# Altium PCB OpenPack_BATMOD_V1p0.PcbDoc (part 1 of 2)
Units mil, origin at the board's own origin, x right, y up, seen from the top; angles counter-clockwise.
Board outline 5511.81 x 3700.79 mil, 4 copper layers (Top Layer, Mid Layer 1, Mid Layer 2, Bottom Layer), stack 61.811 mil thick; 232 components, 137 nets, 760 pads, 470 vias.
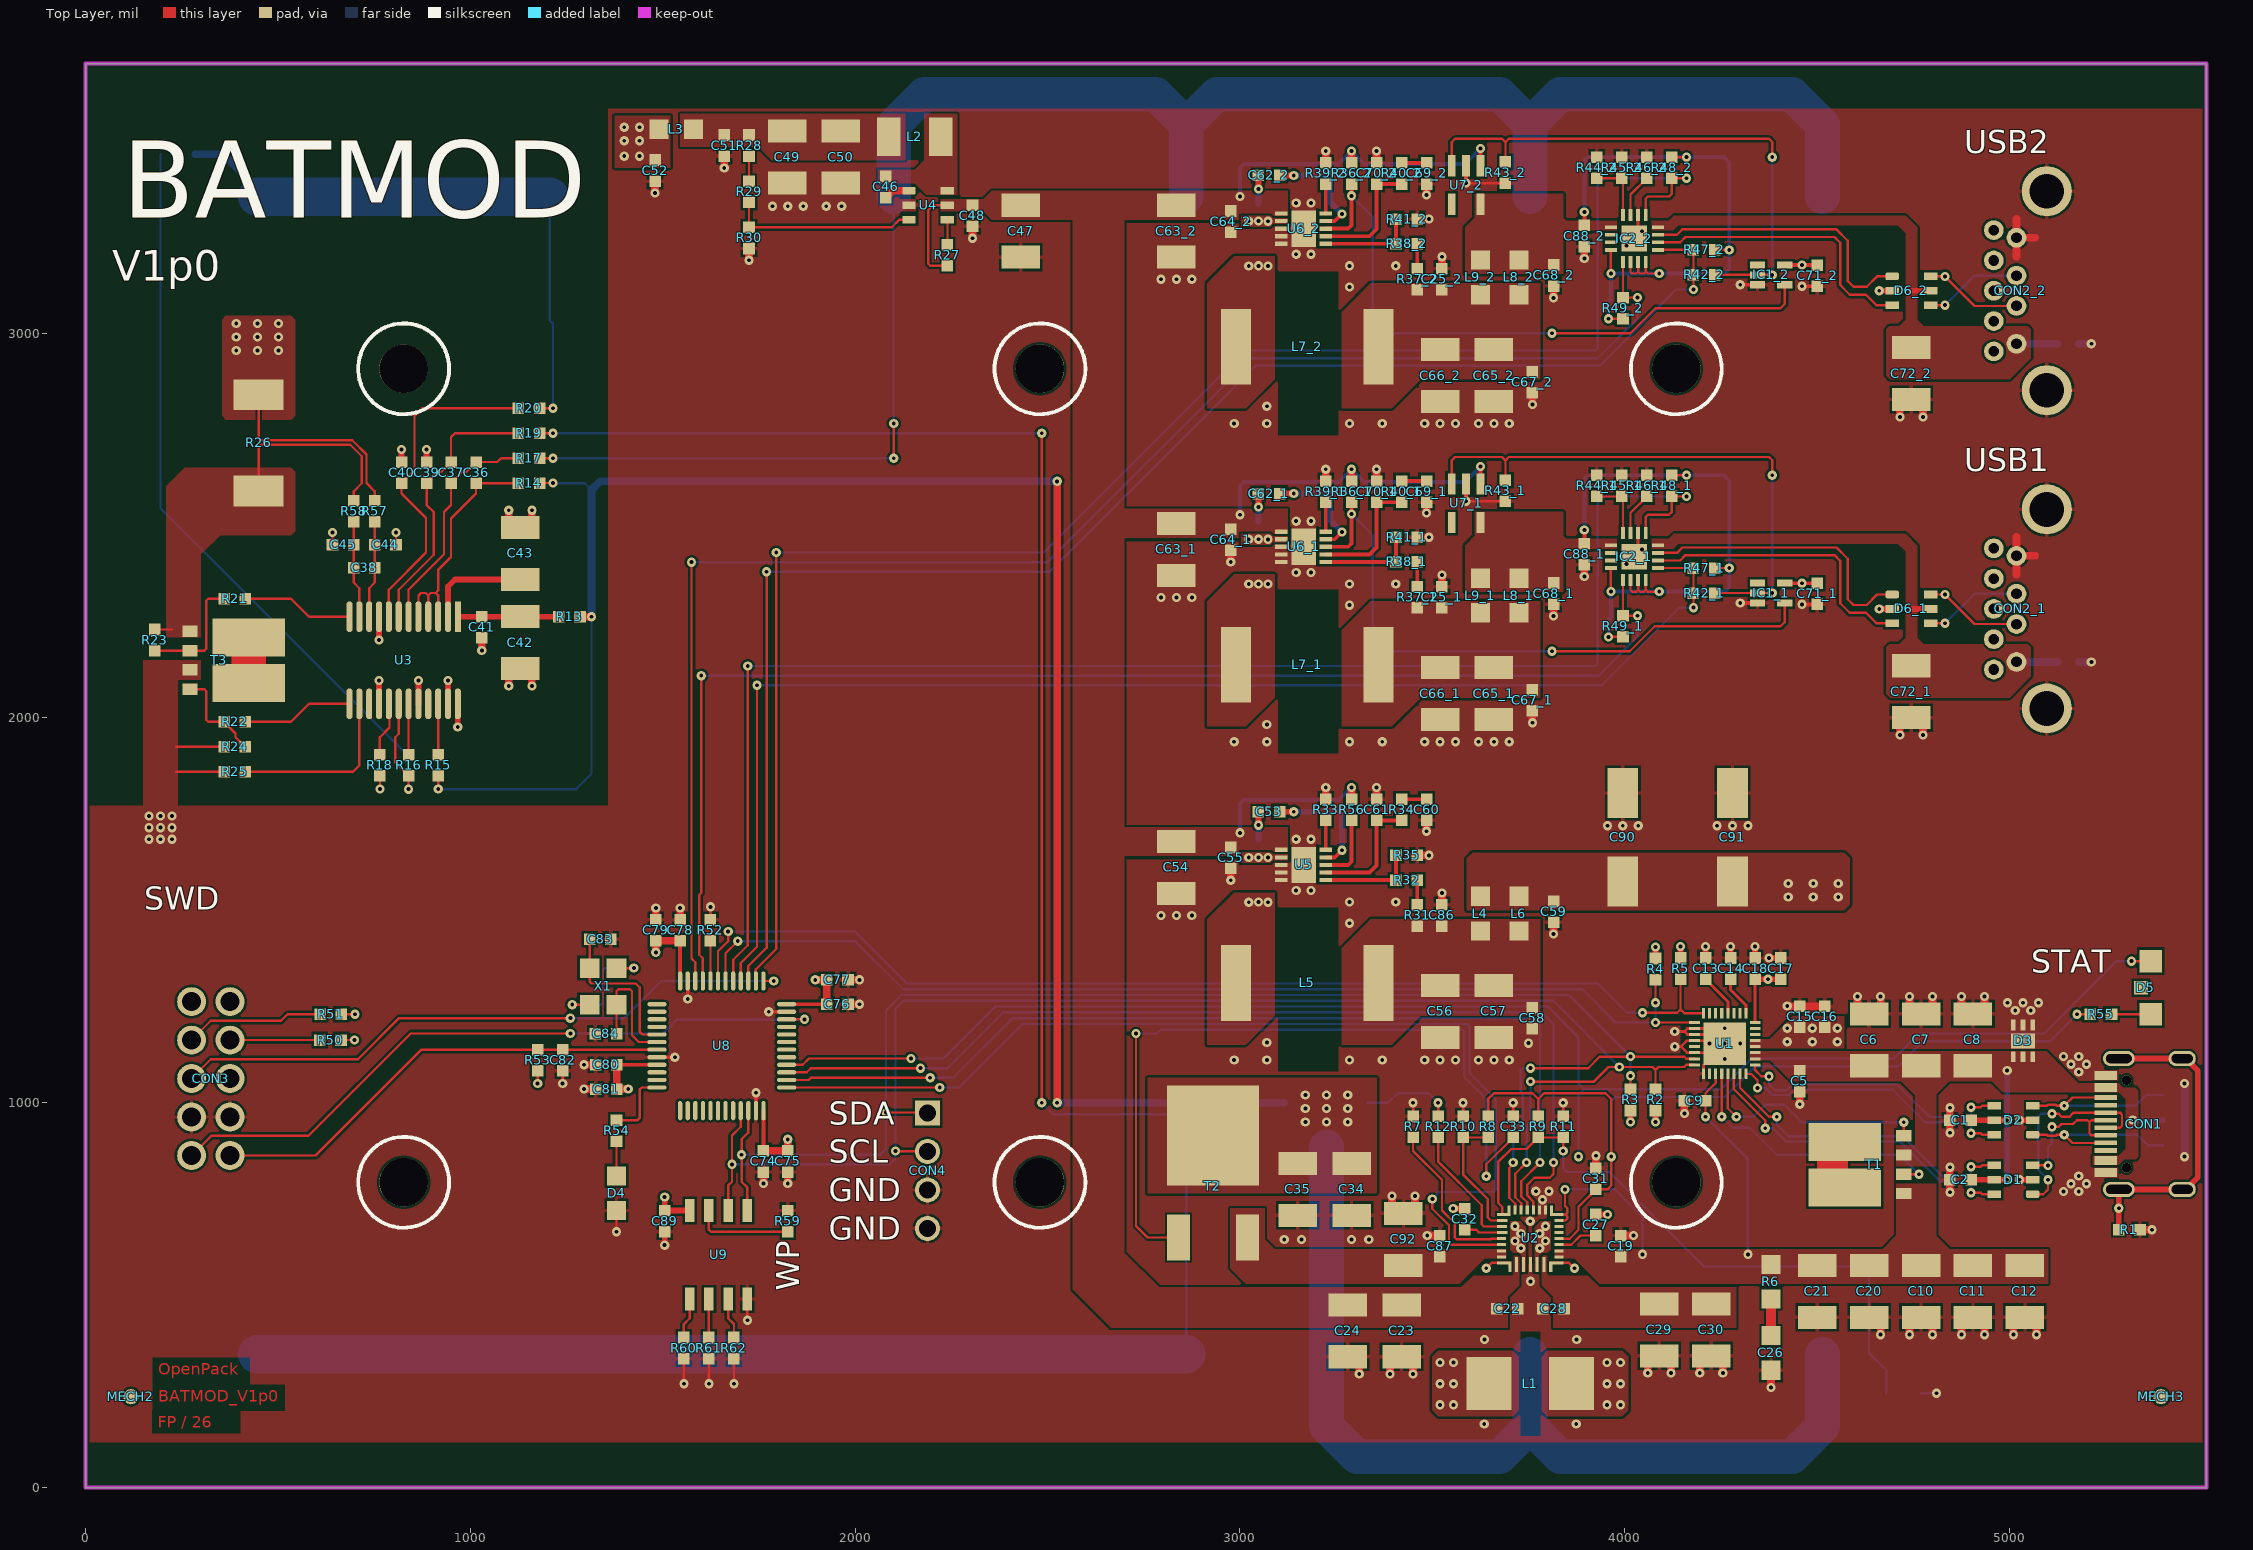
[diagram p0: Top Layer view]
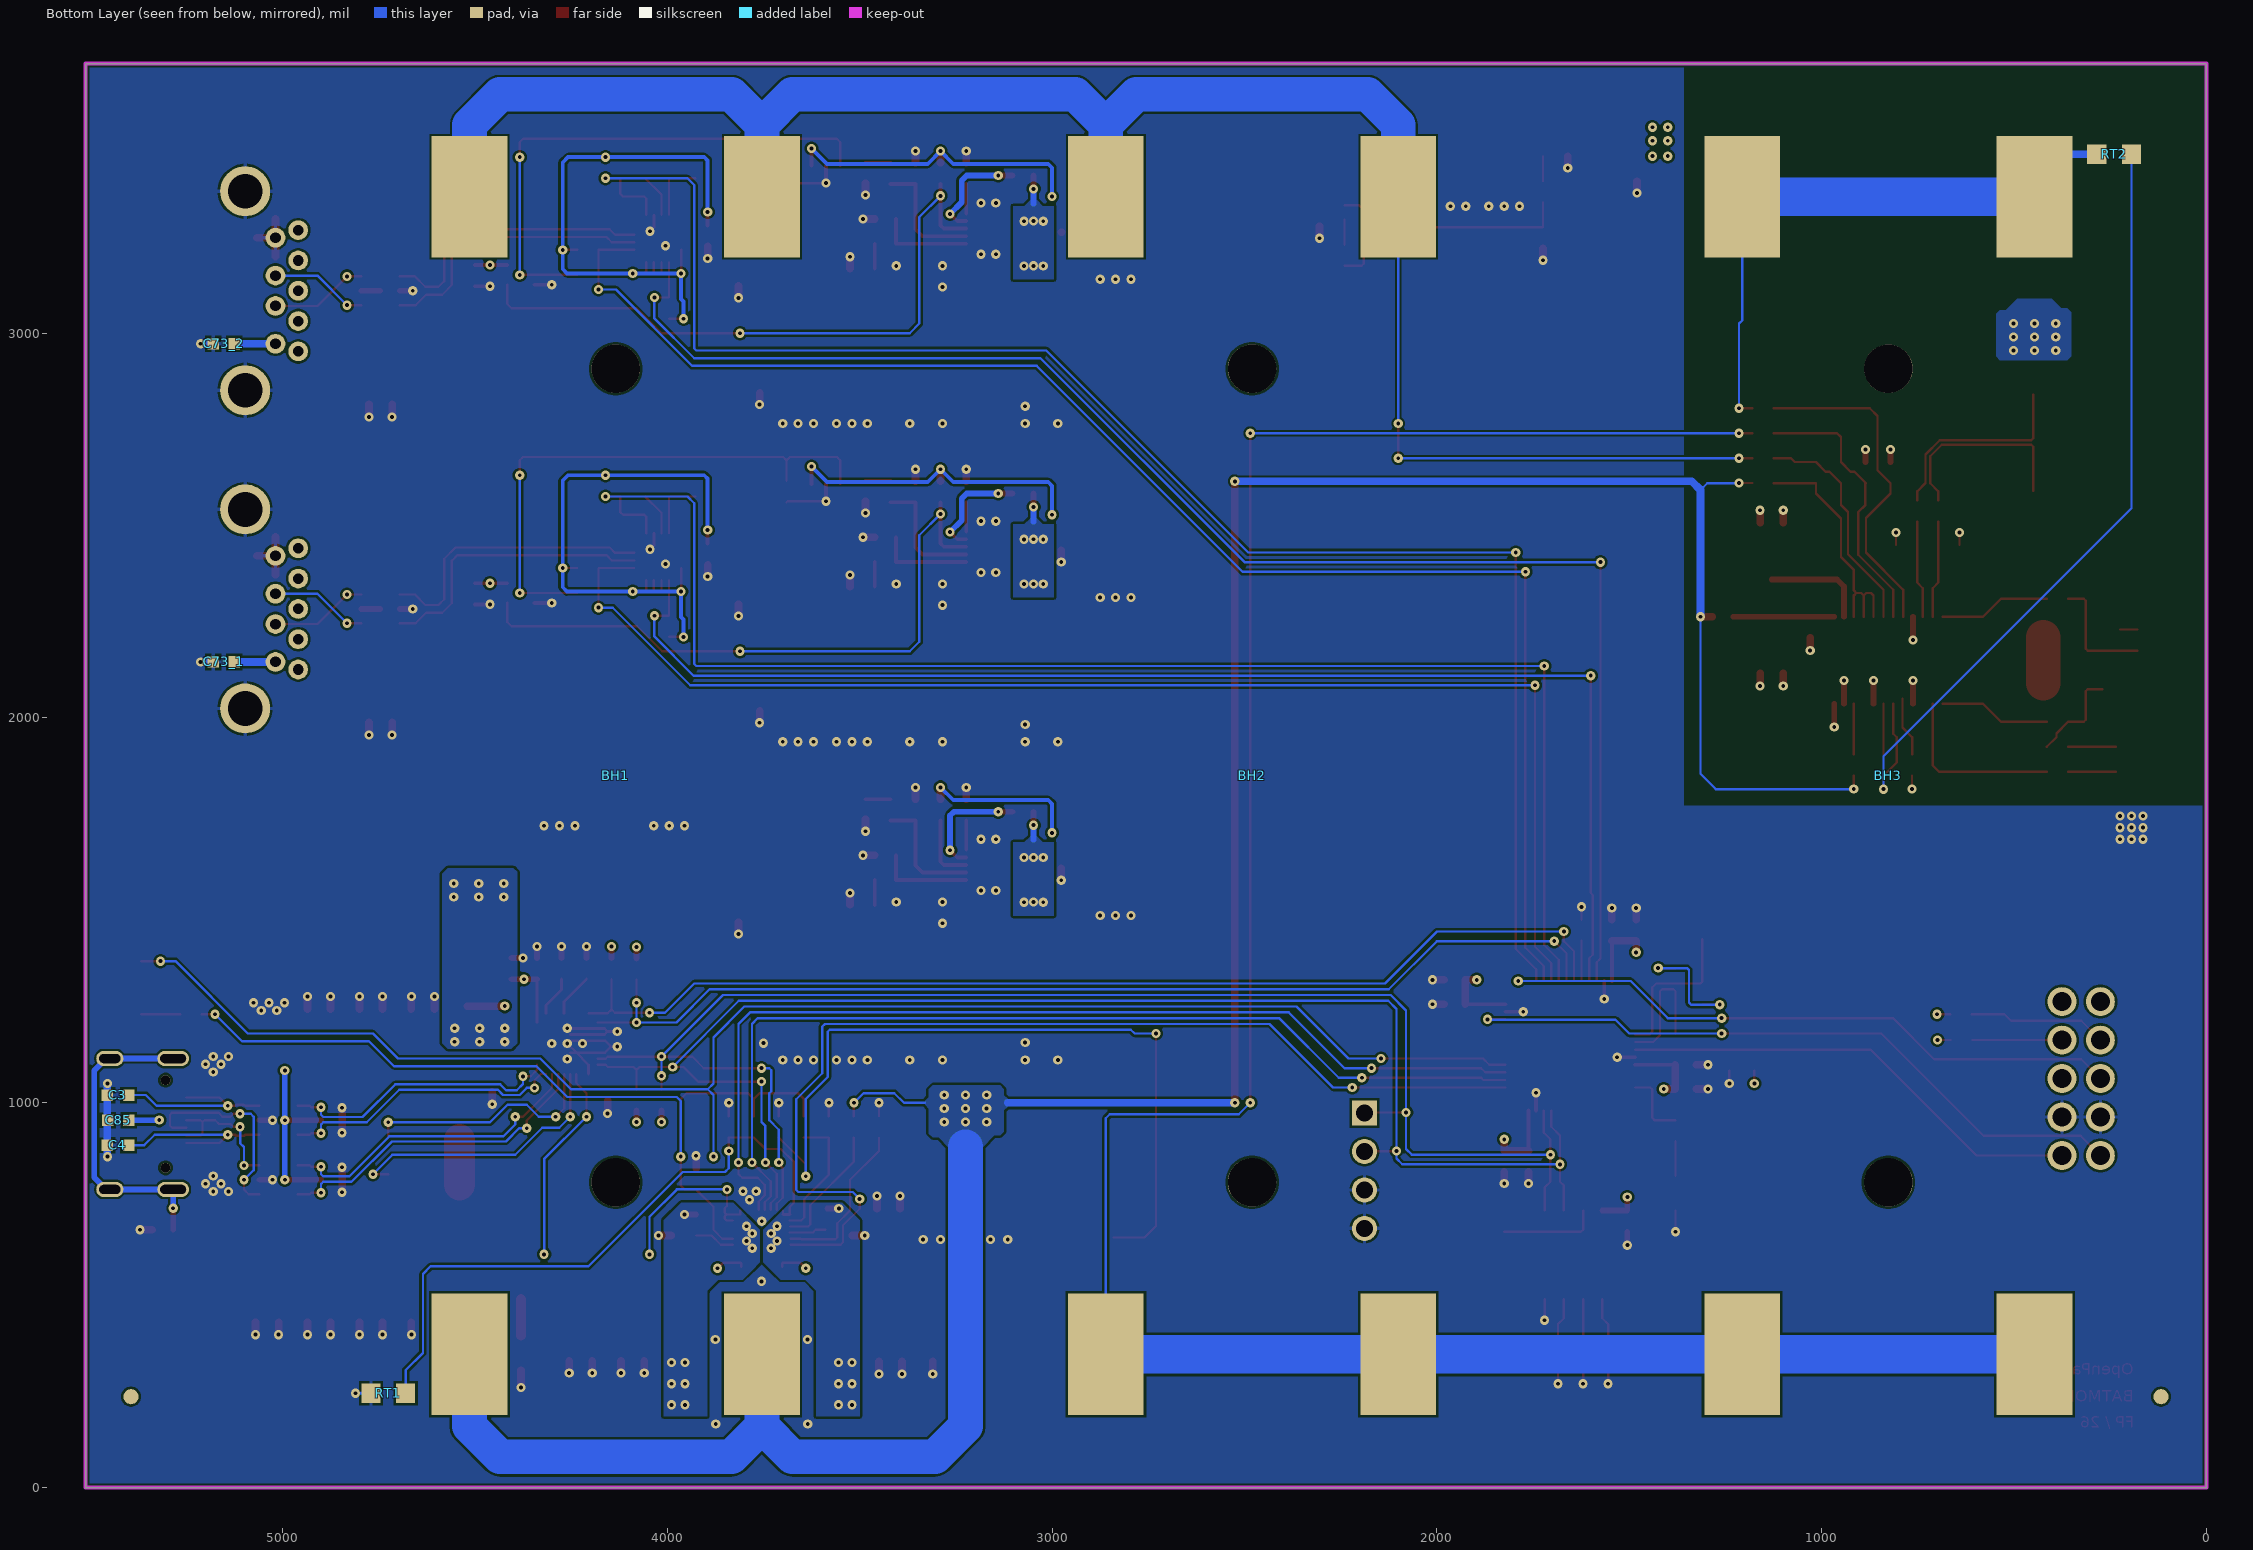
[diagram p1: Bottom Layer view, seen from below]
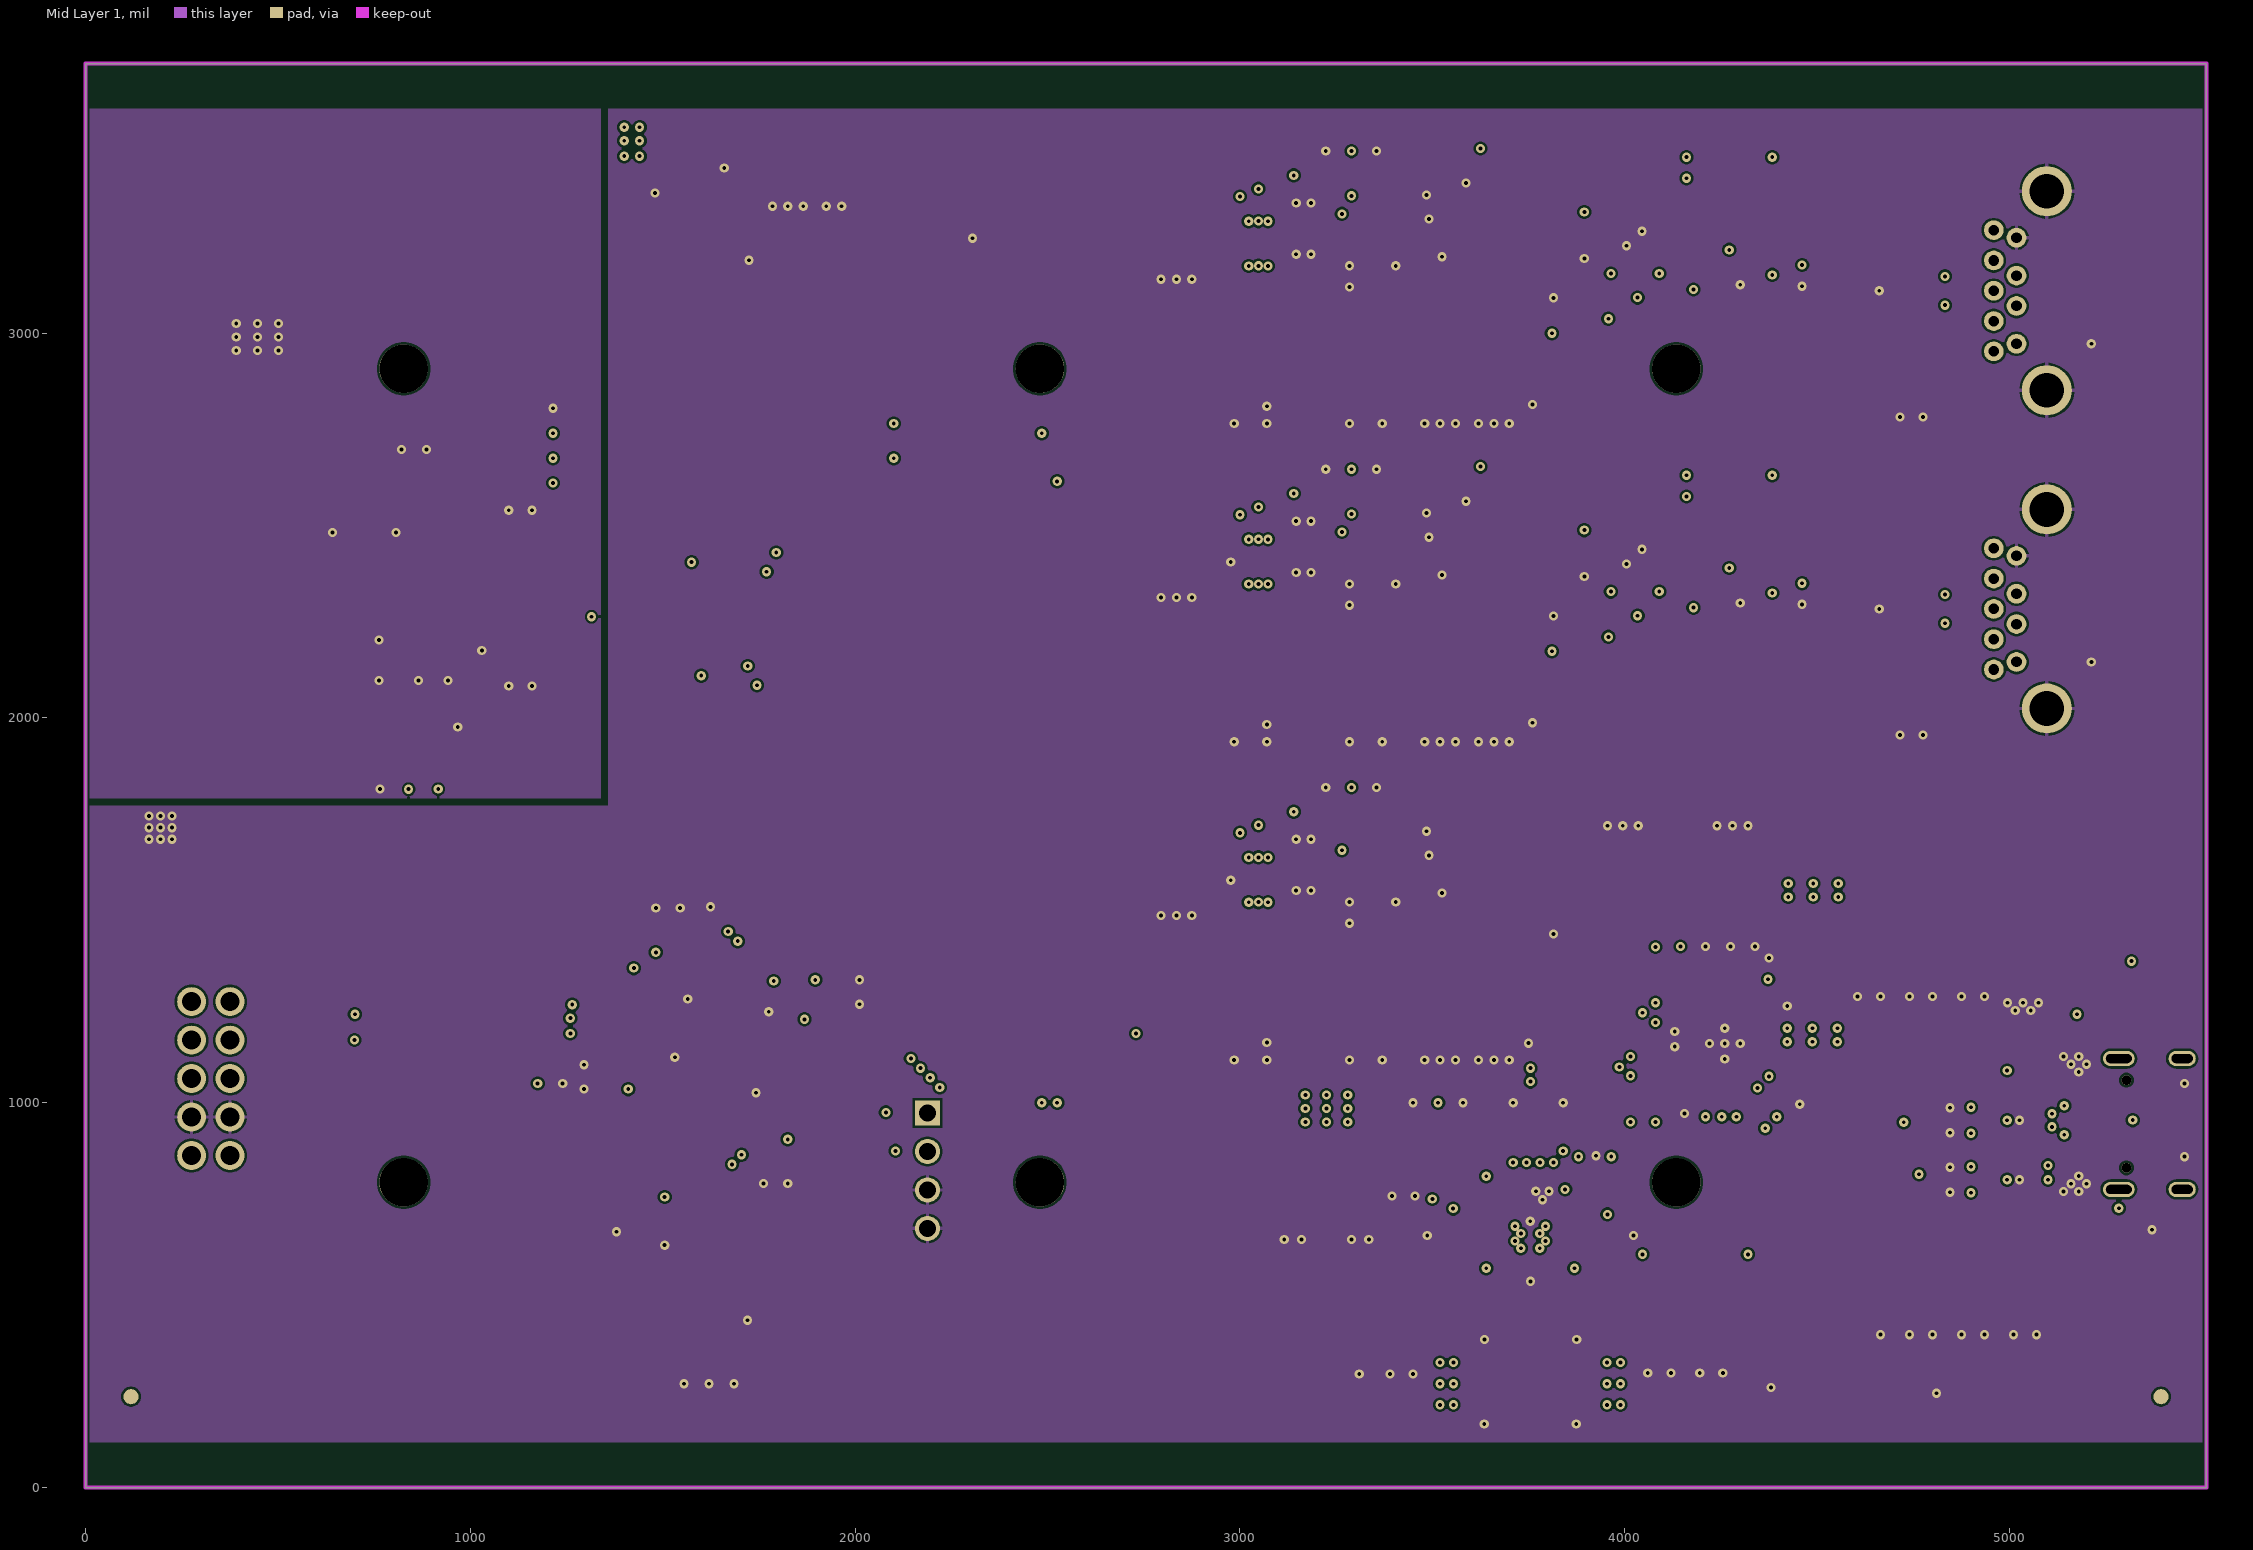
[diagram p2: Mid Layer 1]
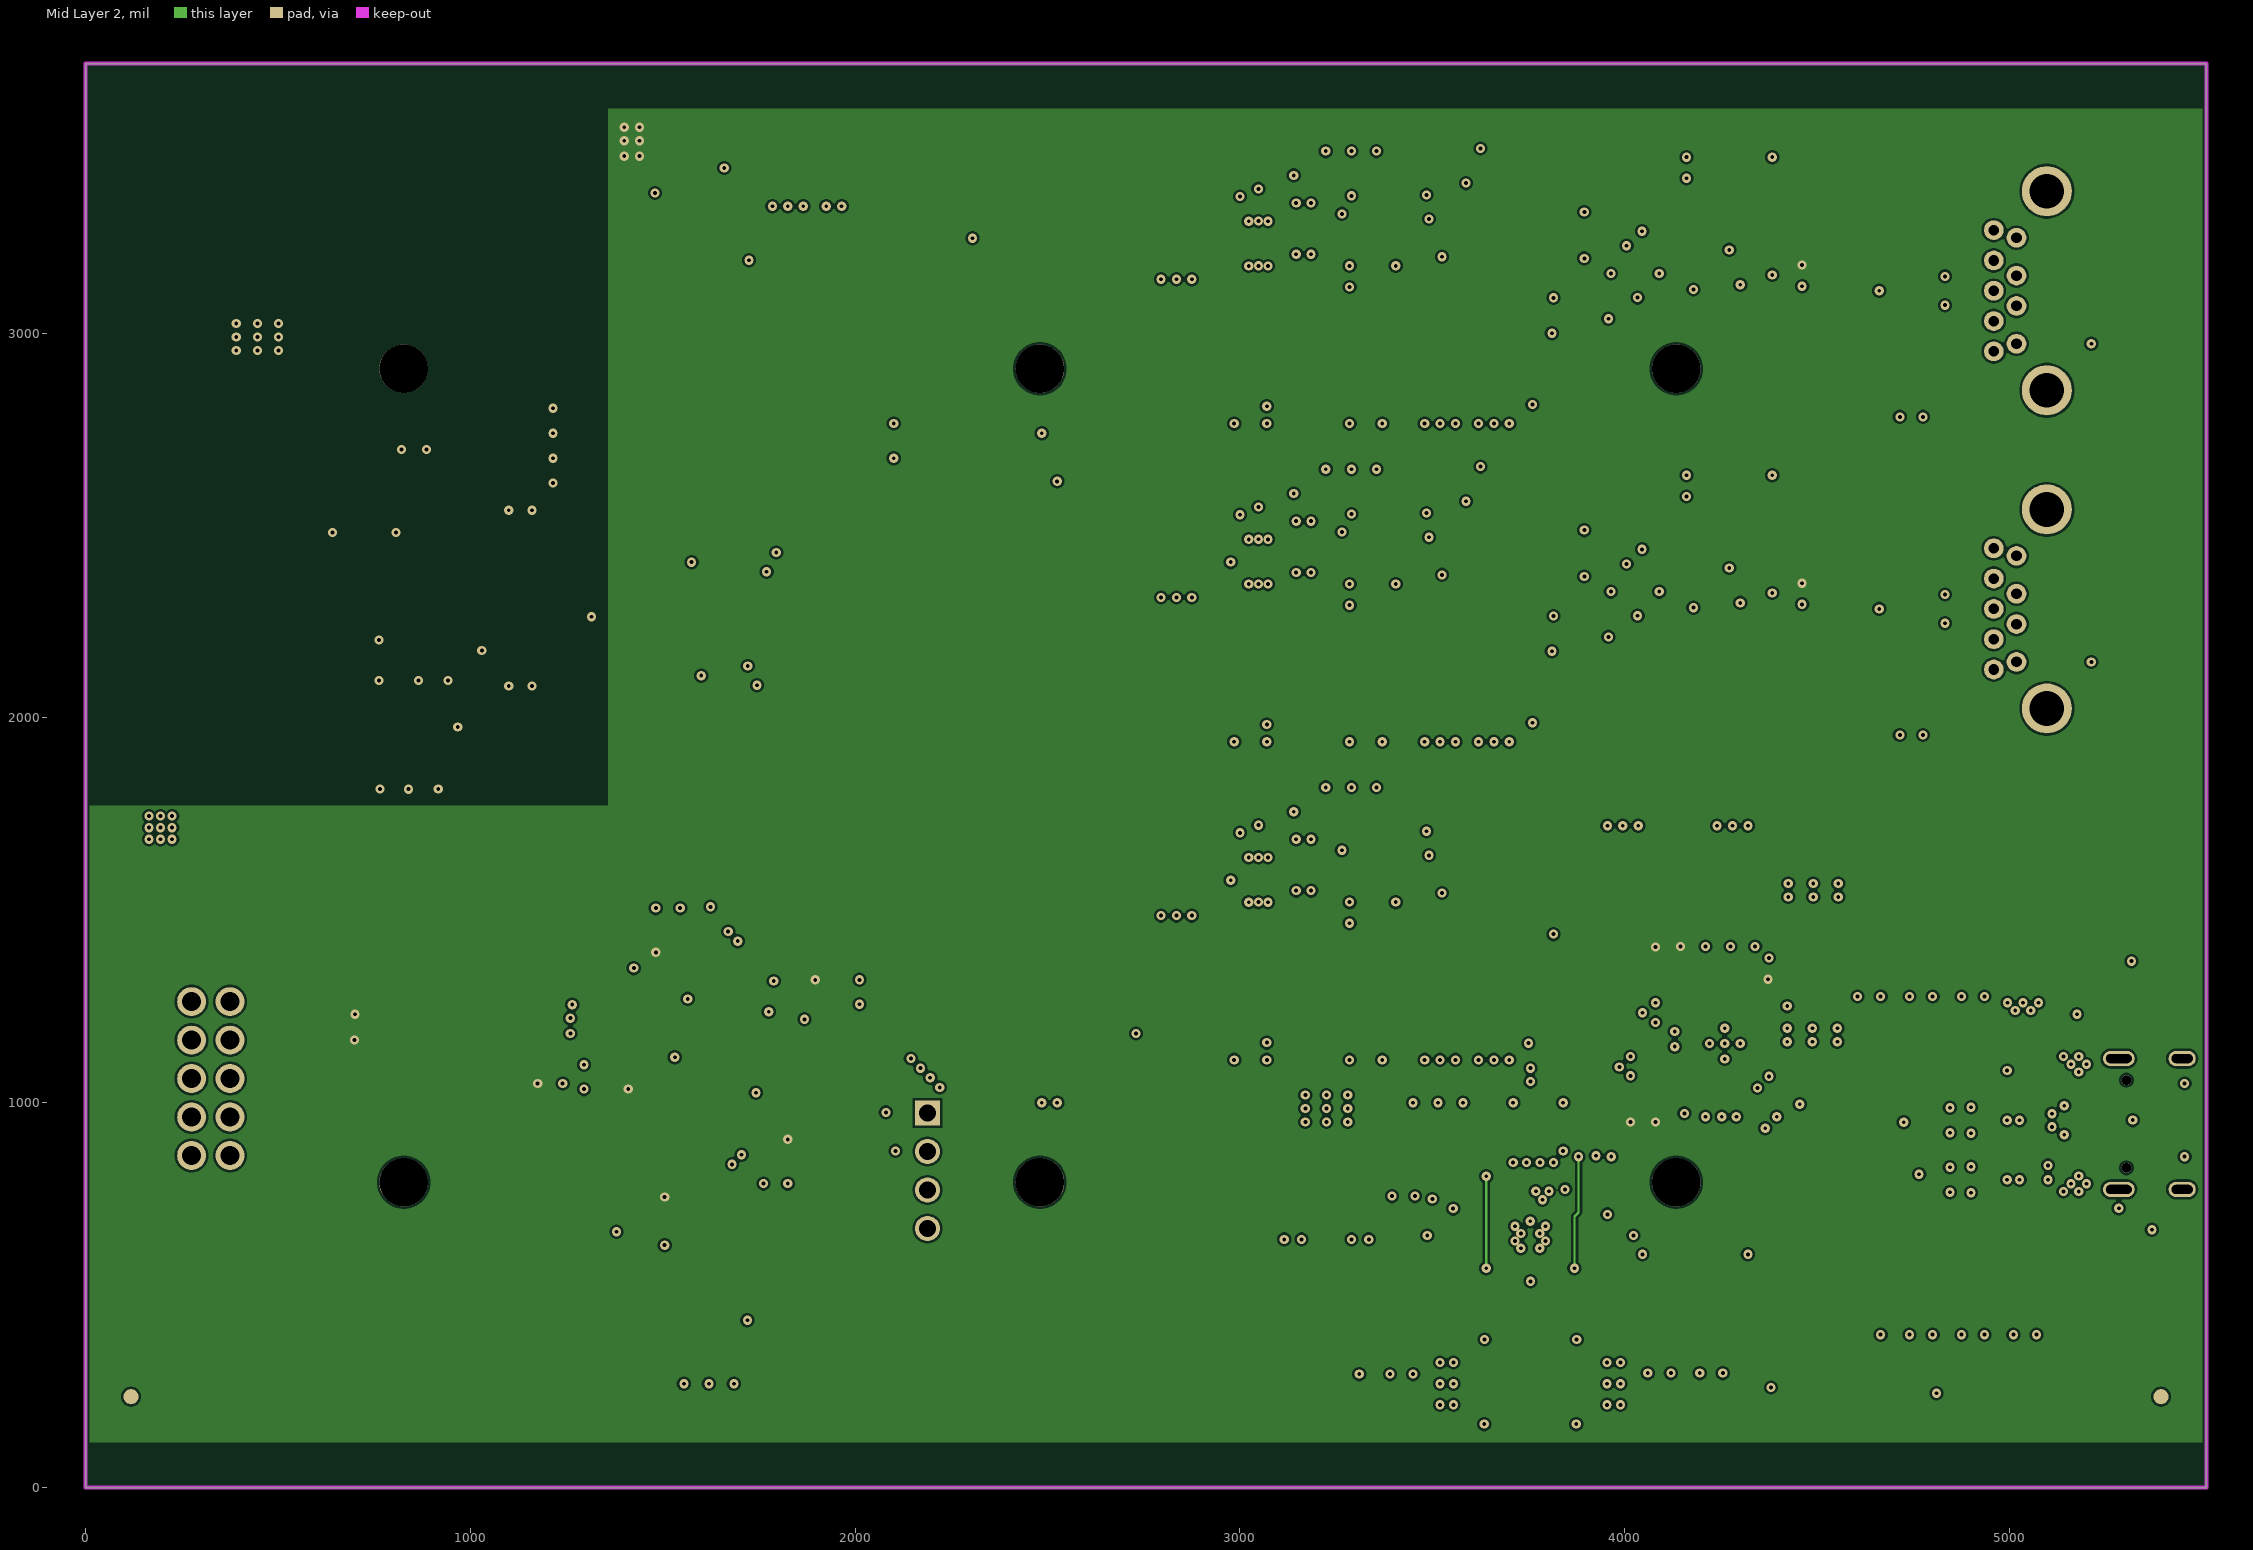
[diagram p3: Mid Layer 2]

## Layer stack, top to bottom
Top Solder: solder mask 0.5, Solder Resist, Dk 3.8
Top Layer: signal copper 1.378
Dielectric 1: prepreg 3.937, 2313, Dk 4.05
Mid Layer 1: signal copper 0.689
Core: core 49.8031, FR-4, Dk 4.5
Mid Layer 2: signal copper 0.689
Dielectric 2: prepreg 3.937, 2313, Dk 4.05
Bottom Layer: signal copper 1.378
Bottom Solder: solder mask 0.5, Solder Resist, Dk 3.8

## Board outline
0,0 0,3700.79 5511.81,3700.79 5511.81,0

## Design rules (kind name [scope] priority, off if disabled: settings)
Clearance Clearance_Default [All] p1: gap=6 ignorepadtopadclearanceinfootprint=FALSE
HoleSize [All] p1: absolutevalues=TRUE maxlimit=150 minlimit=10 maxpercent=80.000 minpercent=20.000
MinimumSolderMaskSliver [All] p1: minsoldermaskwidth=1
PlaneClearance [All] p1: clearance=10
PlaneConnect PlaneConnect_Default [All] p1: pad.planeconnectstyle=Relief pad.reliefexpansion=20 pad.reliefentries=4 pad.reliefconductorwidth=10 pad.reliefairgap=6 via.planeconnectstyle=Direct via.reliefexpansion=20 via.reliefentries=4 via.reliefconductorwidth=10 via.reliefairgap=10
PolygonConnect PolygonConnect_Direct [IsNamedPolygon('DIRECT')] p1: connectstyle=Direct reliefconductorwidth=10 reliefentries=4 polygonreliefangle="90 Angle" airgapwidth=10
PolygonConnect PolygonConnect_Default [All] p2: thpad.connectstyle=Relief thpad.reliefconductorwidth=10 thpad.reliefentries=4 thpad.polygonreliefangle="90 Angle" thpad.airgapwidth=6 smdpad.connectstyle=Relief smdpad.reliefconductorwidth=10 smdpad.reliefentries=4 smdpad.polygonreliefangle="90 Angle" smdpad.airgapwidth=6 via.connectstyle=Direct via.reliefconductorwidth=10 via.reliefentries=4 via.polygonreliefangle="90 Angle" via.airgapwidth=10
RoomDefinition USBA2 [InComponentClass('USBA2')] p1: confinementstyle=ConfineIn formatcopy=TRUE lockcomponents=FALSE outline 2755.91,2716.54 5708.66,2716.54 5708.66,3523.62 2755.91,3523.62
RoomDefinition USBA1 [InComponentClass('USBA1')] p2: confinementstyle=ConfineIn formatcopy=TRUE lockcomponents=FALSE outline 2755.91,1889.76 5708.66,1889.76 5708.66,2696.85 2755.91,2696.85
RoutingVias RoutingVias_Default [All] p1: holewidth=10 width=24 viastyle="Through Hole" minholewidth=10 minwidth=24 maxholewidth=28 maxwidth=50
SolderMaskExpansion [All] p1: expansion=0 istentingtop=FALSE
SupplyNets "Schematic Supply Nets_4" [InNet('+3V3')] p1: voltage=0.000
SupplyNets "Schematic Supply Nets_3" [InNet('+5V')] p2: voltage=0.000
SupplyNets "Schematic Supply Nets_2" [InNet('GND')] p3: voltage=0.000
SupplyNets "Schematic Supply Nets_1" [InNet('BP_GND')] p4: voltage=0.000
Width Width_Default [All] p1: maxlimit=200 minlimit=6 preferedwidth=15
26 further rules are at their usual default settings.

## Classes and differential pairs
channel class OpenPack_BATMOD_V1p0_USBA: USBA1 USBA2
component class USBC: C1 C2 C3 C4 C85 CON1 D1 D2 D3 R1
component class USBA2: C25_2 C62_2 C63_2 C64_2 C65_2 C66_2 C67_2 C68_2 C69_2 C70_2 C71_2 C72_2 C73_2 C88_2 CON2_2 D6_2 IC1_2 IC2_2 L7_2 L8_2 L9_2 R36_2 R37_2 R38_2 R39_2 R40_2 R41_2 R42_2 R43_2 R44_2 R45_2 R46_2 R47_2 R48_2 R49_2 U6_2 U7_2
component class USBA1: C25_1 C62_1 C63_1 C64_1 C65_1 C66_1 C67_1 C68_1 C69_1 C70_1 C71_1 C72_1 C73_1 C88_1 CON2_1 D6_1 IC1_1 IC2_1 L7_1 L8_1 L9_1 R36_1 R37_1 R38_1 R39_1 R40_1 R41_1 R42_1 R43_1 R44_1 R45_1 R46_1 R47_1 R48_1 R49_1 U6_1 U7_1
component class PWR: C46 C47 C48 C49 C50 C51 C52 C53 C54 C55 C56 C57 C58 C59 C60 C61 C86 L2 L3 L4 L5 L6 R27 R28 R29 R30 R31 R32 R33 R34 R35 R56 U4 U5
component class MECH: MECH2 MECH3
component class MCU: C74 C75 C76 C77 C78 C79 C80 C81 C82 C83 C84 C89 CON3 CON4 D4 R50 R51 R52 R53 R54 R59 R60 R61 R62 U8 U9 X1
component class MAN: C5 C6 C7 C8 C9 C10 C11 C12 C13 C14 C15 C16 C17 C18 C90 C91 R2 R3 R4 R5 T1 U1
component class CHRG: C19 C20 C21 C22 C23 C24 C26 C27 C28 C29 C30 C31 C32 C33 C34 C35 C87 C92 D5 L1 R6 R7 R8 R9 R10 R11 R12 R55 RT1 T2 U2
component class BAT: BH1 BH2 BH3 C36 C37 C38 C39 C40 C41 C42 C43 C44 C45 R13 R14 R15 R16 R17 R18 R19 R20 R21 R22 R23 R24 R25 R26 R57 R58 RT2 T3 U3

## Components (designator, comment, footprint, x,y, rotation, side; value= is the part's Value field where it differs from the comment)
BH1 "12BHC186P-GR" 12BHC186P-GR 4899.61,3326.77 r270 bottom locked
BH2 "12BHC186P-GR" 12BHC186P-GR 1714.57,374.02 r90 bottom locked
BH3 "12BHC186P-GR" 12BHC186P-GR 1592.52,3326.77 r270 bottom locked
C1 "100nF" CAP_0603 4872.5,954.52 r0 top
C2 "100nF" CAP_0603 4872.5,799.95 r0 top
C3 "330pF" CAP_0603 5427.5,1020 r180 bottom
C4 "330pF" CAP_0603 5427.5,890 r180 bottom
C5 "100nF" CAP_0603 4455,1056.24 r90 top
C6 "10uF" CAP_1210 4635,1163.74 r270 top
C7 "10uF" CAP_1210 4770,1163.74 r270 top
C8 "10uF" CAP_1210 4905,1163.74 r270 top
C9 "100nF" CAP_0603 4182.5,1005 r0 top
C10 "10uF" CAP_1210 4770,510 r90 top
C11 "10uF" CAP_1210 4905,510 r90 top
C12 "10uF" CAP_1210 5040,510 r90 top
C13 "10uF" CAP_0603 4210,1348.74 r270 top
C14 "10uF" CAP_0603 4275,1348.74 r270 top
C15 "100nF" CAP_0603 4455,1223.74 r270 top
C16 "10uF" CAP_0603 4520,1223.74 r270 top
C17 "100nF" CAP_0603 4405,1348.74 r270 top
C18 "10uF" CAP_0603 4338.74,1348.74 r270 top
C19 "100nF" CAP_0603 3990,627.5 r270 top
C20 "10uF" CAP_1210 4635,510 r90 top
C21 "10uF" CAP_1210 4500,510 r90 top
C22 "100nF" CAP_0603 3695,465 r180 top
C23 "10uF" CAP_1210 3420,407.5 r90 top
C24 "10uF" CAP_1210 3280,407.5 r90 top
C25_1 "100nF" CAP_0603 3525,2313.62 r90 top (schematic designator C25)
C25_2 "100nF" CAP_0603 3525,3140.4 r90 top (schematic designator C25)
C26 "2.2uF" CAP-0805 4380,350 r90 top
C27 "47nF" CAP_0603 3925,682.5 r270 top
C28 "100nF" CAP_0603 3815,465 r0 top
C29 "10uF" CAP_1210 4090,410 r90 top
C30 "10uF" CAP_1210 4225,410 r90 top
C31 "10uF" CAP_0603 3925,802.5 r270 top
C32 "47nF" CAP_0603 3584.13,697.5 r90 top
C33 "dnm (1nF)" CAP_0603 3710,937.5 r270 top
C34 "10uF" CAP_1210 3290,775 r90 top
C35 "10uF" CAP_1210 3150,775 r90 top
C36 "100nF" CAP_0603 1015,2637.5 r270 top
C37 "100nF" CAP_0603 950,2637.5 r270 top
C38 "100nF" CAP_0603 724.41,2390 r0 top
C39 "100nF" CAP_0603 886.4,2637.5 r270 top
C40 "100nF" CAP_0603 821.4,2637.5 r90 top
C41 "100nF" CAP_0603 1030,2235.7 r90 top
C42 "10uF" CAP_1210 1130,2195.7 r90 top
C43 "10uF" CAP_1210 1130,2427.5 r270 top
C44 "100nF" CAP_0603 779.41,2450 r180 top
C45 "100nF" CAP_0603 669.41,2450 r0 top
C46 "100nF" CAP_0603 2080,3380 r270 top
C47 "10uF" CAP_1210 2430,3265 r90 top
C48 "100nF" CAP_0603 2305,3305 r270 top
C49 "47uF" CAP_1210 1824.23,3457.5 r90 top
C50 "47uF" CAP_1210 1962.5,3457.5 r90 top
C51 "100nF" CAP_0603 1660,3487.5 r270 top
C52 "100nF" CAP_0603 1480,3422.5 r270 top
C53 "100nF" CAP_0603 3075.5,1756.46 r0 top
C54 "10uF" CAP_1210 2835,1611.46 r90 top
C55 "100nF" CAP_0603 2976,1636.46 r270 top
C56 "47uF" CAP_1210 3520,1237.5 r90 top
C57 "47uF" CAP_1210 3660,1237.5 r90 top
C58 "100nF" CAP_0603 3760,1220 r270 top
C59 "100nF" CAP_0603 3815,1496.46 r270 top
C60 "10nF" CAP_0603 3485,1761.46 r270 top
C61 "120pF" CAP_0603 3355,1761.46 r90 top
C62_1 "100nF" CAP_0603 3075.5,2583.23 r0 top (schematic designator C62)
C62_2 "100nF" CAP_0603 3075.5,3410 r0 top (schematic designator C62)
C63_1 "10uF" CAP_1210 2835,2438.23 r90 top (schematic designator C63)
C63_2 "10uF" CAP_1210 2835,3265 r90 top (schematic designator C63)
C64_1 "100nF" CAP_0603 2976,2463.23 r270 top (schematic designator C64)
C64_2 "100nF" CAP_0603 2976,3290 r270 top (schematic designator C64)
C65_1 "47uF" CAP_1210 3660,2063.23 r90 top (schematic designator C65)
C65_2 "47uF" CAP_1210 3660,2890 r90 top (schematic designator C65)
C66_1 "47uF" CAP_1210 3520,2063.23 r90 top (schematic designator C66)
C66_2 "47uF" CAP_1210 3520,2890 r90 top (schematic designator C66)
C67_1 "100nF" CAP_0603 3760,2045.73 r270 top (schematic designator C67)
C67_2 "100nF" CAP_0603 3760,2872.5 r270 top (schematic designator C67)
C68_1 "100nF" CAP_0603 3815,2323.23 r270 top (schematic designator C68)
C68_2 "100nF" CAP_0603 3815,3150 r270 top (schematic designator C68)
C69_1 "10nF" CAP_0603 3485,2588.23 r270 top (schematic designator C69)
C69_2 "10nF" CAP_0603 3485,3415 r270 top (schematic designator C69)
C70_1 "120pF" CAP_0603 3355,2588.23 r90 top (schematic designator C70)
C70_2 "120pF" CAP_0603 3355,3415 r90 top (schematic designator C70)
C71_1 "100nF" CAP_0603 4500,2322.82 r270 top (schematic designator C71)
C71_2 "100nF" CAP_0603 4500,3149.59 r270 top (schematic designator C71)
C72_1 "47uF" CAP_1210 4745,2068.23 r90 top (schematic designator C72)
C72_2 "47uF" CAP_1210 4745,2895 r90 top (schematic designator C72)
C73_1 "100nF" CAP_0603 5152.5,2145.67 r0 bottom (schematic designator C73)
C73_2 "100nF" CAP_0603 5152.5,2972.44 r0 bottom (schematic designator C73)
C74 "100nF" CAP_0603 1761.81,847.5 r90 top
C75 "10uF" CAP_0603 1825,847.5 r90 top
C76 "100nF" CAP_0603 1954.04,1256.27 r180 top
C77 "10uF" CAP_0603 1954.04,1319.46 r180 top
C78 "100nF" CAP_0603 1545.28,1448.5 r270 top
C79 "10uF" CAP_0603 1482.09,1448.5 r270 top
C80 "10nF" CAP_0603 1353.04,1098.79 r0 top
C81 "10uF" CAP_0603 1353.04,1035.6 r0 top
C82 "100nF" CAP_0603 1240,1110.66 r90 top
C83 "22p / NP0" CAP_0603 1337.5,1425 r180 top
C84 "22p / NP0" CAP_0603 1352.5,1180 r0 top
C85 "100nF" CAP_0603 5427,954.72 r180 bottom
C86 "100nF" CAP_0603 3525,1486.85 r90 top
C87 "100nF" CAP_0603 3519.13,627.5 r270 top
C88_1 "10uF" CAP_0603 3895,2425.73 r90 top (schematic designator C88)
C88_2 "10uF" CAP_0603 3895,3252.5 r90 top (schematic designator C88)
C89 "100nF" CAP_0603 1505,692.5 r90 top
C90 "100uF" CAP-SMD-6.3X7.7 3995,1690 r180 top
C91 "100uF" CAP-SMD-6.3X7.7 4280,1690 r180 top
C92 "10uF" CAP_1210 3425,645 r270 top
CON1 "WE_629722000214" WE_629722000214 5403.54,944.88 r90 top
CON2_1 "WE_692121030100" WE_692121030100 5236.22,2283.46 r90 top (schematic designator CON2)
CON2_2 "WE_692121030100" WE_692121030100 5236.22,3110.24 r90 top (schematic designator CON2)
CON3 "JTAG-10" CON10-2x5 375.59,862.99 r90 top
CON4 "CON4" CON4_SIMPLE_TH 2188.16,973.54 r270 top
D1 "USBLC6-2SC6" SOT-23-6 5010,799.96 r180 top
D2 "USBLC6-2SC6" SOT-23-6 5010,954.53 r180 top
D3 "TVS2200DRVR" WSON-6 5035,1160.74 r270 top
D4 "KP-2012 SYC" KP-2012-GRN 1379.94,765 r270 top
D5 "HSMG-C110" LED_SMD_90DEG_GRE 5354.33,1299.21 r270 top
D6_1 "USBLC6-2SC6" SOT-23-6 4745,2283.46 r0 top (schematic designator D6)
D6_2 "USBLC6-2SC6" SOT-23-6 4745,3110.23 r0 top (schematic designator D6)
IC1_1 "SN74AHC1G04" SC-70-5 4380.43,2324.72 r270 top (schematic designator IC1)
IC1_2 "SN74AHC1G04" SC-70-5 4380.43,3151.5 r270 top (schematic designator IC1)
IC2_1 "TPS2547RTER" QFN-16 4025,2419.23 r0 top (schematic designator IC2)
IC2_2 "TPS2547RTER" QFN-16 4025,3246 r0 top (schematic designator IC2)
L1 "1uH 8A" WE-LHMI_7030 3754.57,270 r180 top
L2 "47uH 330mA" IND_1210 2155,3510 r180 top
L3 "BLM21SP" IND-0805 1535,3530 r180 top
L4 "WE_742792012" IND-0805 3625,1491.46 r90 top
L5 "100uH" IND_2 3175,1311.46 r90 top
L6 "WE_742792012" IND-0805 3725,1491.46 r90 top
L7_1 "100uH" IND_2 3175,2138.23 r90 top (schematic designator L7)
L7_2 "100uH" IND_2 3175,2965 r90 top (schematic designator L7)
L8_1 "WE_742792012" IND-0805 3725,2318.23 r90 top (schematic designator L8)
L8_2 "WE_742792012" IND-0805 3725,3145 r90 top (schematic designator L8)
L9_1 "WE_742792012" IND-0805 3625,2318.23 r90 top (schematic designator L9)
L9_2 "WE_742792012" IND-0805 3625,3145 r90 top (schematic designator L9)
MECH2 "Fiducial" FIDU_1MM 118.11,236.22 r90 top
MECH3 "Fiducial" FIDU_1MM 5393.7,236.22 r90 top
R1 "100" RES-0603 5311.56,670 r0 top
R2 "2.2k" RES-0603 4080,1007.5 r270 top
R3 "2.2k" RES-0603 4015,1007.5 r270 top
R4 "2.2k" RES-0603 4080,1347.5 r90 top
R5 "2.2k" RES-0603 4145,1348.74 r90 top
R6 "2.2" RES-0805 4380,535 r90 top
R7 "10.5k" RES-0603 3450,937.5 r90 top
R8 "0" RES-0603 3645,937.5 r270 top
R9 "5.1k" RES-0603 3775,937.5 r270 top
R10 "dnm" RES-0603 3580,937.5 r90 top
R11 "31k" RES-0603 3840,937.5 r90 top
R12 "100" RES-0603 3515,937.5 r270 top
R13 "1k" RES-0603 1257.5,2263.2 r0 top
R14 "1k" RES-0603 1152.5,2610 r180 top
R15 "10k" RES-0603 916.34,1877.5 r90 top
R16 "10k" RES-0603 839.57,1877.5 r90 top
R17 "1k" RES-0603 1152.5,2675 r180 top
R18 "196k" RES-0603 765,1877.5 r90 top
R19 "1k" RES-0603 1152.5,2740 r180 top
R20 "1k" RES-0603 1152.5,2805 r180 top
R21 "1k" RES-0603 387.5,2310 r0 top
R22 "1k" RES-0603 387.5,1990 r0 top
R23 "1M" RES-0603 180,2202.5 r270 top
R24 "1M" RES-0603 387.5,1925 r0 top
R25 "1M" RES-0603 387.5,1860 r0 top
R26 "10mR" RES-2512 450,2715 r270 top
R27 "100" RES-0603 2240,3202.5 r270 top
R28 "22k" RES-0603 1724.23,3487.5 r90 top
R29 "47k" RES-0603 1724.23,3367.5 r90 top
R30 "22k" RES-0603 1724.23,3247.5 r90 top
R31 "51k" RES-0603 3460.64,1486.85 r270 top
R32 "100k" RES-0603 3433.14,1578.72 r0 top
R33 "100k" RES-0603 3223.16,1761.46 r270 top
R34 "3.3k" RES-0603 3420,1761.46 r270 top
R35 "20k" RES-0603 3433.14,1643.08 r180 top
R36_1 "dnm" RES-0603 3290,2588.23 r90 top (schematic designator R36)
R36_2 "dnm" RES-0603 3290,3415 r90 top (schematic designator R36)
R37_1 "51k" RES-0603 3460.64,2313.62 r270 top (schematic designator R37)
R37_2 "51k" RES-0603 3460.64,3140.4 r270 top (schematic designator R37)
R38_1 "100k" RES-0603 3433.14,2405.49 r0 top (schematic designator R38)
R38_2 "100k" RES-0603 3433.14,3232.26 r0 top (schematic designator R38)
R39_1 "100k" RES-0603 3223.16,2588.23 r270 top (schematic designator R39)
R39_2 "100k" RES-0603 3223.16,3415 r270 top (schematic designator R39)
R40_1 "3.3k" RES-0603 3420,2588.23 r270 top (schematic designator R40)
R40_2 "3.3k" RES-0603 3420,3415 r270 top (schematic designator R40)
R41_1 "20k" RES-0603 3433.14,2469.85 r180 top (schematic designator R41)
R41_2 "20k" RES-0603 3433.14,3296.62 r180 top (schematic designator R41)
R42_1 "100" RES-0603 4206,2324.72 r180 top (schematic designator R42)
R42_2 "100" RES-0603 4206,3151.5 r180 top (schematic designator R42)
R43_1 "dnm" RES-0603 3690,2590.73 r90 top (schematic designator R43)
R43_2 "dnm" RES-0603 3690,3417.5 r90 top (schematic designator R43)
R44_1 "51k" RES-0603 3927.5,2603.2 r270 top (schematic designator R44)
R44_2 "51k" RES-0603 3927.5,3429.98 r270 top (schematic designator R44)
R45_1 "51k" RES-0603 3992.5,2603.2 r270 top (schematic designator R45)
R45_2 "51k" RES-0603 3992.5,3429.98 r270 top (schematic designator R45)
R46_1 "dnm" RES-0603 4057.5,2603.2 r270 top (schematic designator R46)
R46_2 "dnm" RES-0603 4057.5,3429.98 r270 top (schematic designator R46)
R47_1 "10k" RES-0603 4206,2389.7 r0 top (schematic designator R47)
R47_2 "10k" RES-0603 4206,3216.47 r0 top (schematic designator R47)
R48_1 "10k" RES-0603 4122.5,2603.2 r90 top (schematic designator R48)
R48_2 "10k" RES-0603 4122.5,3429.98 r90 top (schematic designator R48)
R49_1 "10k" RES-0603 3995.47,2238.22 r270 top (schematic designator R49)
R49_2 "10k" RES-0603 3995.47,3065 r270 top (schematic designator R49)
R50 "22" RES-0603 636.5,1162.99 r180 top
R51 "22" RES-0603 637.5,1230 r0 top
R52 "10k" RES-0603 1624.02,1448.5 r90 top
R53 "10k" RES-0603 1175,1110.66 r270 top
R54 "220R" RES-0603 1379.94,927.5 r270 top
R55 "2.2k" RES-0603 5237.5,1230 r0 top
R56 "100" RES-0603 3290,1761.46 r90 top
R57 "100" RES-0603 751.91,2537.5 r270 top
R58 "100" RES-0603 696.91,2537.5 r270 top
R59 "10k" RES-0603 1825,692.5 r270 top
R60 "10k" RES-0603 1555,362.5 r90 top
R61 "10k" RES-0603 1620,362.5 r90 top
R62 "10k" RES-0603 1685,362.5 r90 top
RT1 "NTCS0805E3103FLT" RES-0805 4725,245 r180 bottom
RT2 "NTCS0805E3103FLT" RES-0805 240,3465 r180 bottom
T1 "NVMFD024N06CT1G" "SO-8FL (DFN8)" 4615,839.37 r90 top
T2 "NTD3055L104T4G" DPAK 2930,782.5 r90 top
T3 "NVMFD024N06CT1G" "SO-8FL (DFN8)" 381.21,2150 r270 top
U1 "TPS25751SRSMR" "QFN32 - 0.4mm" 4260,1153.74 r270 top
U2 "BQ25798RQMR" "QFN 29" 3754.57,646.93 r180 top
U3 "BQ7791500PWT" TSSOP24 826.77,2150 r270 top
U4 "LMR51403YDBVR" SOT-23-6 2190,3332.49 r0 top
U5 "TPS54335A" VSON-10 3165.58,1618.09 r0 top
U6_1 "TPS54335A" VSON-10 3165.58,2444.86 r0 top (schematic designator U6)
U6_2 "TPS54335A" VSON-10 3165.58,3271.63 r0 top (schematic designator U6)
U7_1 "TPS7E8250QDBVRQ1" SOT-23-5 3587.6,2558.23 r270 top (schematic designator U7)
U7_2 "TPS7E8250QDBVRQ1" SOT-23-5 3587.6,3385 r270 top (schematic designator U7)
U8 "STM32F103C8T6TR" LQFP48_L 1653.54,1148 r0 top
U9 "CAT24C256WI-GT3" SOIC8 1645,605 r90 top
X1 "16MHz" XTAL-32x25 1345,1305 r270 top

## Footprints (in the part's own frame and the unit in brackets; to place one, negate y for a bottom-side part, rotate by r counter-clockwise, add the part's x,y. Pads: shape width x height; smd on the part's side, far side on the other; paste and mask are expansions set on the pad)
12BHC186P-GR [mm]
  round 3.2 hole 3.2 unplated: 0(10.65,19.45) 0(64.35,19.45)
  rect 8x5 smd: 1(-0.7,29.1) 2(75.7,29.1) 3(-0.7,9.8) 4(75.7,9.8)
  body extent -0.5,-1 75.5,40, height 21
CAP-0805 [mil]
  rect 50x50 smd: 1(-45,0) 2(45,0)
  body extent -39,-25 39,25, height 24
CAP-SMD-6.3X7.7 [mil]
  rect 80x130 smd: 1(0,115) 2(0,-115)
  body extent -130,-144 130,144, height 303
CAP_0603 [mil]
  rect 30x30 smd: 1(-27.5,0) 2(27.5,0)
  body extent -31,-16 31,16, height 22
CAP_1210 [mil]
  rect 60x100 smd paste-2: 1(-67.5,0) 2(67.5,0)
  body extent -79,-49 79,49, height 67
CON4_SIMPLE_TH [mil]
  rect 65x65 hole 44: 1(0,0)
  round 65 hole 44: 2(100,0) 3(200,0) 4(300,0)
CON10-2x5 [mil]
  round 75 hole 50: 1(0,0) 2(0,100) 3(100,0) 4(100,100) 5(200,0) 6(200,100) 7(300,0) 8(300,100) 9(400,0) 10(400,100)
  body extent -202,-127 602,227, height 354
DPAK [mil]
  rect 120x60 smd: 1(-132.5,90) 3(-132.5,-90)
  rect 260x240 smd: 4(132.5,0)
  body extent -156,-129 235,129, height 96
FIDU_1MM [mm]
  round 1 all layers, no hole: 0(0,0)
IND-0805 [mil]
  rect 50x50 smd: 1(-45,0) 2(45,0)
  body extent -34,-19 34,19, height 37
IND_2 [mm]
  rect 5x2 smd: 1(0,4.7) 2(0,-4.7)
  body extent -5.1,-5.15 5.1,5.15, height 3.9
IND_1210 [mil]
  rect 60x100 smd paste-2: 1(-67.5,0) 2(67.5,0)
  body extent -66,-49 66,49, height 91
KP-2012-GRN [mil]
  rect 50x50 smd: 1(-45,0) 2(45,0)
  body extent -39,-25 39,25, height 43
LED_SMD_90DEG_GRE [mm]
  rect 1.5x1.5 smd: A(1.75,0.325) K(-1.75,0.325)
  rect 0.9x0.9 smd: x(0,-0.325)
  body extent -1.5,-0.15 1.5,1.85, height 1.02
LQFP48_L [mil]
  oval 50x11 smd: 1(-168.46,108.27) 2(-168.46,88.58) 3(-168.46,68.9) 4(-168.46,49.21) 5(-168.46,29.53) 6(-168.46,9.84) 7(-168.46,-9.84) 8(-168.46,-29.53) 9(-168.46,-49.21) 10(-168.46,-68.9) 11(-168.46,-88.58) 12(-168.46,-108.27) 25(168.46,-108.27) 26(168.46,-88.58) 27(168.46,-68.9) 28(168.46,-49.21) 29(168.46,-29.53) 30(168.46,-9.84) 31(168.46,9.84) 32(168.46,29.53) 33(168.46,49.21) 34(168.46,68.9) 35(168.46,88.58) 36(168.46,108.27)
  oval 11x50 smd: 13(-108.27,-168.46) 14(-88.58,-168.46) 15(-68.9,-168.46) 16(-49.21,-168.46) 17(-29.53,-168.46) 18(-9.84,-168.46) 19(9.84,-168.46) 20(29.53,-168.46) 21(49.21,-168.46) 22(68.9,-168.46) 23(88.58,-168.46) 24(108.27,-168.46) 37(108.27,168.46) 38(88.58,168.46) 39(68.9,168.46) 40(49.21,168.46) 41(29.53,168.46) 42(9.84,168.46) 43(-9.84,168.46) 44(-29.53,168.46) 45(-49.21,168.46) 46(-68.9,168.46) 47(-88.58,168.46) 48(-108.27,168.46)
  body extent -177,-177 177,177, height 62
"QFN32 - 0.4mm" [mm]
  rect 0.7x0.2 smd: 1(-2,1.4) 2(-2,1) 3(-2,0.6) 4(-2,0.2) 5(-2,-0.2) 6(-2,-0.6) 7(-2,-1) 8(-2,-1.4) 17(2,-1.4) 18(2,-1) 19(2,-0.6) 20(2,-0.2) 21(2,0.2) 22(2,0.6) 23(2,1) 24(2,1.4)
  rect 0.2x0.7 smd: 9(-1.4,-2) 10(-1,-2) 11(-0.6,-2) 12(-0.2,-2) 13(0.2,-2) 14(0.6,-2) 15(1,-2) 16(1.4,-2) 25(1.4,2) 26(1,2) 27(0.6,2) 28(0.2,2) 29(-0.2,2) 30(-0.6,2) 31(-1,2) 32(-1.4,2)
  rect 2.8x2.8 smd: 33(0,0)
  body extent -2.05,-2.05 2.05,2.05, height 1
"QFN 29" [mm]
  rect 0.75x0.2 smd: 1(-1.825,1.6) 24(1.825,1.6)
  rect 0.2x0.7 smd: 1(-1.35,1.85) 9(-1.4,-1.85) 16(1.4,-1.85) 24(1.35,1.85)
  rect 0.6x0.2 smd: 2(-1.9,1.2) 3(-1.9,0.8) 4(-1.9,0.4) 5(-1.9,0) 6(-1.9,-0.4) 7(-1.9,-0.8) 8(-1.9,-1.2) 20(1.9,0) 21(1.9,0.4) 22(1.9,0.8) 23(1.9,1.2)
  rect 0.7x0.2 smd: 9(-1.85,-1.6) 16(1.853,-1.6) 17(1.85,-1.2)
  rect 0.2x0.6 smd: 10(-1,-1.9) 11(-0.6,-1.9) 12(-0.2,-1.9) 13(0.2,-1.9) 14(0.6,-1.9) 15(1,-1.9)
  rect 0.65x0.2 smd: 18(1.875,-0.8)
  rect 0.68x0.2 smd: 19(1.86,-0.4)
  rect 0.2x1 smd: 25(0.9,1.7) 26(0.45,1.7) 27(0,1.7) 28(-0.45,1.7) 29(-0.9,1.7)
  body extent -2,-2 2,2, height 1
QFN-16 [mm]
  rect 0.8x0.25 smd: 1(-1.55,0.75) 2(-1.55,0.25) 3(-1.55,-0.25) 4(-1.55,-0.75) 9(1.55,-0.75) 10(1.55,-0.25) 11(1.55,0.25) 12(1.55,0.75)
  rect 0.25x0.8 smd: 5(-0.75,-1.55) 6(-0.25,-1.55) 7(0.25,-1.55) 8(0.75,-1.55) 13(0.75,1.55) 14(0.25,1.55) 15(-0.25,1.55) 16(-0.75,1.55)
  rect 1.7x1.7 smd: 17(0,0)
  body extent -1.5,-1.5 1.5,1.5, height 0.9
RES-0603 [mil]
  rect 30x30 smd: 1(-27.5,0) 2(27.5,0)
  body extent -31,-16 31,16, height 18
RES-0805 [mil]
  rect 50x50 smd: 1(-45,0) 2(45,0)
  body extent -45,-27 45,27, height 30
RES-2512 [mil]
  rect 80x130 smd: 1(-125,0) 2(125,0)
  body extent -126,-63 126,63, height 28
SC-70-5 [mm]
  rect 0.47x1 smd: 1(-0.65,-0.9) 2(0,-0.9) 3(0.65,-0.9) 4(0.65,0.9) 5(-0.65,0.9)
  body extent -1.01,-1.09 0.99,1.01, height 0.95
"SO-8FL (DFN8)" [mm]
  rect 0.75x1 smd: 1(-1.905,-2.795) 2(-0.635,-2.795) 3(0.635,-2.795) 4(1.905,-2.795)
  rect 2.5x4.8 smd: 9(-1.5,1.1) 10(1.5,1.1)
  body extent -2.58,-3 2.57,3.18, height 1.13
SOIC8 [mil]
  rect 60x25 smd: 1(-115,75) 2(-115,25) 3(-115,-25) 4(-115,-75) 5(115,-75) 6(115,-25) 7(115,25) 8(115,75)
  body extent -118,-96 118,96, height 69
SOT-23-5 [mil]
  rect 55x20 smd: 1(-50,37.4) 2(-50,0.01) 3(-50,-37.4) 4(50,-37.4) 5(50,37.4)
  body extent -63,-59 55,59, height 51
SOT-23-6 [mil]
  rrect50% 35x20 smd: 1(-50,37.4)
  rect 35x20 smd: 2(-50,0.01) 3(-50,-37.4) 4(50,-37.4) 5(50,0.01) 6(50,37.4)
  body extent -48,-55 48,55, height 43
TSSOP24 [mm]
  rect 2.032x0.4 smd paste+0 mask+0.051: 1(-2.875,3.575)
  rrect100% 2.032x0.4 smd paste+0 mask+0.051: 2(-2.875,2.925) 3(-2.875,2.275) 4(-2.875,1.625) 5(-2.875,0.975) 6(-2.875,0.325) 7(-2.875,-0.325) 8(-2.875,-0.975) 9(-2.875,-1.625) 10(-2.875,-2.275) 11(-2.875,-2.925) 12(-2.875,-3.575) 13(2.875,-3.575) 14(2.875,-2.925) 15(2.875,-2.275) 16(2.875,-1.625) 17(2.875,-0.975) 18(2.875,-0.325) 19(2.875,0.325) 20(2.875,0.975) 21(2.875,1.625) 22(2.875,2.275) 23(2.875,2.925) 24(2.875,3.575)
  body extent -3.2,-3.9 3.2,3.9, height 1.2
VSON-10 [mm]
  rect 0.825x0.28 smd mask+0.07: 1(-1.462,1) 2(-1.462,0.5) 3(-1.462,0) 4(-1.462,-0.5) 5(-1.462,-1) 6(1.463,-1) 7(1.463,-0.5) 8(1.463,0) 9(1.463,0.5) 10(1.463,1)
  rect 1.6x2.4 smd paste-5: EXP(0,0)
  body extent -1.58,-1.58 1.57,1.57, height 1
WE-LHMI_7030 [mm] "SMT Power Inductor, 2-Leads, body 6.6x6.6mm"
  rect 2.95x3.5 smd: 1(-2.725,0) 2(2.725,0)
  body extent -3.65,-3.3 3.65,3.3, height 2.8
WE_629722000214 [mm] "USB TYPE C VERTICAL PLUG"
  rect 0.6x1.5 smd: A1/B12(-3.2,3.905) A4/B9(-2.4,3.905) A9/B4(2.4,3.905) A12/B1(3.2,3.905)
  rect 0.3x1.5 smd: A5(-1.25,3.905) A6(-0.25,3.905) A7(0.25,3.905) A8(1.25,3.905) B5(1.75,3.905) B6(0.75,3.905) B7(-0.75,3.905) B8(-1.75,3.905)
  round 0.65 hole 0.65 unplated: MH1(-2.89,2.535) MH2(2.89,2.535)
  oval 1x1.8 hole 0.6 slot 1.4 at 90 deg: Shell(-4.32,-1.145) Shell(4.32,-1.145)
  oval 1x2.1 hole 0.6 slot 1.7 at 90 deg: Shell(-4.32,3.035) Shell(4.32,3.035)
  body extent -4.79,-3.76 4.79,3.95, height 3.33
WE_692121030100 [mm]
  round 1.3 hole 0.7: 1(-3.5,5.54) 2(-1,5.54) 3(1,5.54) 4(3.5,5.54) 5(4,7.04) 6(2,7.04) 7(0,7.04) 8(-2,7.04) 9(-4,7.04)
  round 3.3 hole 2.3: Shell(-6.57,3.54) Shell(6.57,3.54)
  body extent -7.74,-8.24 7.74,8.31, height 8.07
WSON-6 [mm]
  rect 0.7x0.3 smd paste-0.025 mask+0.07: 1(-1.05,0.65) 2(-1.05,0) 3(-1.05,-0.65) 4(1.05,-0.65) 5(1.05,0) 6(1.05,0.65)
  rect 1x1.6 smd paste-0.1 mask+0.07: 7(0,0)
  body extent -1.01,-1 1.01,1, height 0.8
XTAL-32x25 [mm]
  rect 1.3x1.3 smd: 1(-1.143,-0.889) 2(1.27,-0.889) 3(1.27,0.889) 4(-1.143,0.889)
  body extent -1.6,-1.25 1.6,1.25, height 0.83

## Part data
BH1 BH2 BH3: "Battery holder, 2x18650", ComponentLink1Description=Order, ComponentLink2Description=Datasheet, ComponentLink2URL=https://hu.mouser.com/en/ProductDetail/Eagle-Plastic-Devices/12BHC186P-GR?qs=AQlKX63v8Rv70Ee1H7gwgg%3D%3D, Part Number=12BHC186P-GR, Supplier=Mouser, Type=MECH
C1 C2 C3 C4 C5 C9 C13 C14 C15 C16 C17 C18 C19 C22 C25_1 C25_2 C26 C27 C28 C31 C32 C33 C36 C37 C38 C39 C40 C41 C44 C45 C46 C48 C51 C52 C53 C55 C58 C59 C60 C61 C62_1 C62_2 C64_1 C64_2 C67_1 C67_2 C68_1 C68_2 C69_1 C69_2 C70_1 C70_2 C71_1 C71_2 C73_1 C73_2 C74 C75 C76 C77 C78 C79 C80 C81 C82 C83 C84 C85 C86 C87 C88_1 C88_2 C89: library part NP-CAPACITOR, "MLCC capacitor", Type=CAP
C6 C7 C8 C10 C11 C12 C20 C21 C23 C24 C29 C30 C34 C35 C42 C43 C47 C54 C63_1 C63_2 C92: library part NP-CAPACITOR, "UMK325BJ106KM-P", Part Number=810-CGA6P1X7R1N106K2, Supplier=Mouser, Type=CAP
C49 C50 C56 C57 C65_1 C65_2 C66_1 C66_2 C72_1 C72_2: library part NP-CAPACITOR, "Np-Cap", Part Number=80-C1210C476M4P, Supplier=Mouser, Type=CAP
C90 C91: library part P-CAPACITOR, "ELCO capacitor", Type=CAP
CON1: "USB Connectors WR-COM Receptacle USB 2.0 Type C Horizontal SMT 16 pins- PCB Thickness 0.8mm", Part Number=710-629722000214, ComponentLink1Description=Datasheet, ComponentLink2Description=Order, ComponentLink2URL=https://hu.mouser.com/en/ProductDetail/Wurth-Elektronik/629722000214?qs=1Kr7Jg1SGW93XYhc8K3hvA%3D%3D, Supplier=Mouser, Type=CON?
CON2_1 CON2_2: "USB Connectors WR-COM 3.0 TypeA SMT 9Pin Horztl Female", Part Number=710-692121030100, ComponentLink1Description=Datasheet, ComponentLink2Description=Order, ComponentLink2URL=https://hu.mouser.com/en/ProductDetail/Wurth-Elektronik/692121030100?qs=e5m3IbTHPW%252BzU%252B9ZpCsp%2Fg%3D%3D, Supplier=Mouser, Type=IC
CON3: library part JTAG, "JTAG programing connector, 10pin", Part Number=100.261.60, ComponentLink1Description=Datasheet, ComponentLink1URL=ZL231-10PG_EN_10026160.pdf, ComponentLink2Description=Order, ComponentLink2URL=https://www.hestore.hu/prod_10026160.html, Supplier=Hestore, Type=CON
CON4: "Simple 4pin THT, 2.54mm"
D1 D2 D6_1 D6_2: "ESD Protection Diodes / TVS Diodes ESD Protection Low Cap", Part Number=511-USBLC6-2SC6, ComponentLink1Description=Datasheet, ComponentLink2Description=Order, ComponentLink2URL=https://hu.mouser.com/en/ProductDetail/STMicroelectronics/USBLC6-2SC6?qs=po45yt2pPpu%2FhNIlwQdTlg%3D%3D, Supplier=Mouser, Type=Diode
D3: "ESD Protection Diodes / TVS Diodes 22V flat-clamp surge protection device 6", Part Number=595-TVS2200DRVR, ComponentLink1Description=Datasheet, ComponentLink2Description=Order, ComponentLink2URL=https://hu.mouser.com/en/ProductDetail/Texas-Instruments/TVS2200DRVR?qs=W0yvOO0ixfHPbvei2cYdIw%3D%3D, Supplier=Mouser, Type=Diode
D4: "Yellow LED", Part Number=100.290.81, ComponentLink1Description=Datasheet, ComponentLink1URL=KP-2012SYC_EN_10029081.pdf, ComponentLink2Description=Order, ComponentLink2URL=https://www.hestore.hu/prod_10029081.html, Supplier=Hestore, Type=Diode
D5: "Green LED, 90deg", Part Number=630-HSMG-C110, ComponentLink1Description=Datasheet, ComponentLink1URL=AV02_0551EN_DS_HSMx_Cxxx.pdf, ComponentLink2Description=Order, ComponentLink2URL=https://hu.mouser.com/ProductDetail/Broadcom-Avago/HSMG-C110?qs=YDL0qNrpDT4yGVa8S%252B44dw%3D%3D, Supplier=Mouser, Type=Diode
IC1_1 IC1_2: "Signle inverter, 2V-5V", Part Number=595-SN74AHC1G04DCKT, ComponentLink1Description=Datasheet, ComponentLink2Description=Order, ComponentLink2URL=https://hu.mouser.com/ProductDetail/Texas-Instruments/SN74AHC1G04DCKT?qs=pdM4geFiyZTdyzHE1xB18A%3D%3D, Supplier=Mouser, Type=IC
IC2_1 IC2_2: "USB Switch ICs USB charging port co ntroller and 3A pow A 595-TPS2547RTET", Part Number=595-TPS2547RTER, ComponentLink1Description=Datasheet, ComponentLink2Description=Order, ComponentLink2URL=https://hu.mouser.com/en/ProductDetail/Texas-Instruments/TPS2547RTER?qs=sGAEpiMZZMutXGli8Ay4kLXLEI0dbCtTlAK%2FeCGBCiY%3D, Supplier=Mouser, Type=IC
L1: library part "Inductance - 1uH", "Ferrit core coil, 1uH 8A, 10mR", Part Number=710-74437346010, ComponentLink1Description=Datasheet, ComponentLink2Description=Order, ComponentLink2URL=https://hu.mouser.com/en/ProductDetail/Wurth-Elektronik/74437346010?qs=cFlH0mFHHFoJDXer0S4nbw%3D%3D, Supplier=Mouser, Type=IND
L2: library part "Inductance - 47uH", "Power inductor", Part Number=81-LQH32PN470MN0L, ComponentLink1Description=Datasheet, ComponentLink2Description=Order, ComponentLink2URL=https://hu.mouser.com/en/ProductDetail/Murata-Electronics/LQH32PN470MN0L?qs=18WYLvqSxErKIEyluVLVKQ%3D%3D, Supplier=Mouser, Type=IND
L3: library part BLM21SP102SN1D, "Chip Ferrite Bead, 1000R @100MHz, 1.6A", Part Number=81-BLM21SP102SN1D, ComponentLink1Description=Datasheet, ComponentLink1URL=ENFA0005-1915781.pdf, ComponentLink2Description=Order, ComponentLink2URL=https://hu.mouser.com/ProductDetail/Murata-Electronics/BLM21SP102SN1D?qs=17u8i%2FzlE88oj6hmj%252BXptA%3D%3D, Supplier=Mouser, Type=IND
L4 L6 L8_1 L8_2 L9_1 L9_2: "Chip Ferrite Bead, 33R @100MHz, 4A", Part Number=710-742792012, ComponentLink1Description=Datasheet, ComponentLink2Description=Order, ComponentLink2URL=https://hu.mouser.com/en/ProductDetail/Wurth-Elektronik/742792012?qs=J4sk5G6CMwb1B4GP%2Fe%2FxmA%3D%3D, Supplier=Mouser, Type=IND
L5 L7_1 L7_2: library part "Inductance - 22uH", "Ferrit core coil, 22uH 2.85A, 75mR", Part Number=994-MSS1038T-223MLC, ComponentLink1Description=Datasheet, ComponentLink2Description=Order, ComponentLink2URL=https://hu.mouser.com/en/ProductDetail/Coilcraft/MSS1038T-223MLC?qs=zCSbvcPd3pYngswiQ3YHhA%3D%3D, Supplier=Mouser, Type=IND
MECH2 MECH3: library part FIDU, "Fiducatial, round, 1mm"
R1 R2 R3 R4 R5 R6 R7 R8 R9 R10 R11 R12 R13 R14 R15 R16 R17 R18 R19 R20 R21 R22 R23 R24 R25 R26 R27 R28 R29 R30 R31 R32 R33 R34 R35 R36_1 R36_2 R37_1 R37_2 R38_1 R38_2 R39_1 R39_2 R40_1 R40_2 R41_1 R41_2 R42_1 R42_2 R43_1 R43_2 R44_1 R44_2 R45_1 R45_2 R46_1 R46_2 R47_1 R47_2 R48_1 R48_2 R49_1 R49_2 R50 R51 R52 R53 R54 R55 R56 R57 R58 R59 R60 R61 R62: library part RESISTOR, "Metal Film Resistor", Type=RES
RT1 RT2: "NTC (Negative Temperature Coefficient) Thermistors 10Kohms 1%", Part Number=594-NTCS0805E3103FLT, ComponentLink1Description=Datasheet, ComponentLink2Description=Order, ComponentLink2URL=https://hu.mouser.com/en/ProductDetail/Vishay-BC-Components/NTCS0805E3103FLT?qs=%2FWiulJ9oly4Pd4lidS66Yw%3D%3D, Supplier=Mouser, Type=RES
T1 T3: "Power NMOSFET Dual, 60V, 24A, 22mΩ", Part Number=863-NVMFD024N06CT1G, ComponentLink1Description=Datasheet, ComponentLink2Description=Order, ComponentLink2URL=https://hu.mouser.com/en/ProductDetail/onsemi/NVMFD024N06CT1G?qs=GedFDFLaBXEbovCJp2BRhQ%3D%3D, Supplier=Mouser, Type=FET
T2: "Power NMOSFET", Part Number=863-NTD3055L104T4G, ComponentLink1Description=Datasheet, ComponentLink2Description=Order, ComponentLink2URL=https://hu.mouser.com/en/ProductDetail/onsemi/NTD3055L104T4G?qs=ZXBb0xZ9WeBCRGuurIKQ8A%3D%3D, Supplier=Mouser, Type=FET
U1: "USB Interface IC USB Type-C and USB P ower Delivery (PD)", Part Number=595-TPS25751SRSMR, ComponentLink1Description=Datasheet, ComponentLink2Description=Order, ComponentLink2URL=https://hu.mouser.com/en/ProductDetail/Texas-Instruments/TPS25751SRSMR?qs=2wMNvWM5ZX4s3a9I%252B6VO9w%3D%3D, Supplier=Mouser, Type=IC
U2: "Battery Management I C controlled 1-4- cell 5-A buck-boost", Part Number=595-BQ25798RQMR, ComponentLink1Description=Datasheet, ComponentLink2Description=Order, ComponentLink2URL=https://hu.mouser.com/en/ProductDetail/Texas-Instruments/BQ25798RQMR?qs=ljCeji4nMDmr66dwAbNsCg%3D%3D, Supplier=Mouser, Type=IC
U3: "Battery Management 3-series to 5-series stackable", Part Number=595-BQ7791506PWR, ComponentLink1Description=Datasheet, ComponentLink2Description=Order, ComponentLink2URL=https://hu.mouser.com/en/ProductDetail/Texas-Instruments/BQ7791506PWR?qs=GedFDFLaBXGRM0fZiEGV%2Fg%3D%3D, Supplier=Mouser, Type=IC
U4: "Switching Voltage Regulators 4.5V-to-42V 0.3A syn chronous buck conve", Part Number=595-LMR51403YDBVR, ComponentLink1Description=Datasheet, ComponentLink2Description=Order, ComponentLink2URL=https://hu.mouser.com/en/ProductDetail/Texas-Instruments/LMR51403YDBVR?qs=a2MtRaTmNOSR%252BGtnOaFIVg%3D%3D, Supplier=Mouser, Type=PWR-REG
U5 U6_1 U6_2: "Switching Voltage Regulators 4.5Vto28VInp 3A Sync Step-Down Converter A 595-TPS54335ADRCT", Part Number=595-TPS54335ADRCR, ComponentLink1Description=Datasheet, ComponentLink2Description=Order, ComponentLink2URL=https://hu.mouser.com/en/ProductDetail/Texas-Instruments/TPS54335ADRCR?qs=ADSrZYdIRCdK%252Bcxbafh6hw%3D%3D, Supplier=Mouser, Type=PWR-REG
U7_1 U7_2: "LDO Voltage Regulators 5V, 300mA", Part Number=595-TPS7E8250QDBVRQ1, ComponentLink1Description=Datasheet, ComponentLink2Description=Order, ComponentLink2URL=https://hu.mouser.com/en/ProductDetail/Texas-Instruments/TPS7E8250QDBVRQ1?qs=KLj0QfLrw0E8KDpihcr47w%3D%3D, Supplier=Mouser, Type=PWR-REG
U8: "ARM MCU, Cortex-M3, 32 bit, 72 MHz, 64 KB", Part Number=3129604, ComponentLink1Description=Datasheet, ComponentLink1URL=SGST-S-A0001117293-1.pdf, ComponentLink2Description=Order, ComponentLink2URL=https://hu.farnell.com/stmicroelectronics/stm32f103c8t6tr/mcu-32bit-72mhz-lqfp-48/dp/3129604?st=stm32f103c8t6tr, Supplier=Farnell, Type=IC
U9: "EEPROM 256kb I2C", Part Number=698-CAT24C256WI-GT3, ComponentLink1Description=Datasheet, ComponentLink2Description=Order, ComponentLink2URL=https://hu.mouser.com/en/ProductDetail/onsemi/CAT24C256WI-GT3?qs=rZgeL6XvLwaEqwp5Dppodg%3D%3D, Supplier=Mouser, Type=IC
X1: library part 16M-SMD3225, "Crystal oscillator, 16MHz, ±10ppm", Part Number=100.387.05, ComponentLink1Description=Datasheet, ComponentLink1URL=3225-12M-SR_EN_10044508.pdf, ComponentLink2Description=Order, ComponentLink2URL=https://www.hestore.hu/prod_10038705.html, Supplier=Hestore, Type=OTHER

## Via types
v1: diameter 24, hole 10, Top Layer to Bottom Layer, tented both sides, 470 vias

## Nets (pads, with @x,y where several pads share a name; then routed paths per layer and width w, separated by ;. In a path a pad name is that pad's centre, name@x,y a point inside that pad or via, vN(x,y) a via of type N, cw(c..) or ccw(c..) an arc to the next point about the centre after c; other vN are vias at no path point)
+3V3: C17.2 C18.2 C52.1 C71_1.1 C71_2.1 C74.2 C75.2 C76.2 C77.2 C78.2 C79.2 C80.2 C81.2 C89.2 IC1_1.5 IC1_2.5 L3.2 R2.2 R3.2 R4.2 R5.2 R50.1 R51.2 R53.2 U1.32 U8.9 U8.24 U8.36 U8.48 U9.8 | length 1493.5
  Top Layer w6: R50.1@664,1162.99 v1(699,1162.99) ; R51.2@665,1230 v1(700,1230) ; v1(1175,1050) R53.2@1175,1083.16
  Top Layer w8: U1.32@4338.74,1208.86 C18.2@4338.74,1321.24
  Top Layer w10: C80.2@1380.54,1098.79 U8.9@1485.08,1098.79 ; U8.48@1545.28,1316.46 C78.2@1545.28,1421 ; C74.2@1761.81,875 U8.24@1761.81,979.54 ; U8.36@1822.01,1256.27 C76.2@1926.54,1256.27 ; IC1_1.5@4415.87,2350.32 v1(4460.87,2350.32) C71_1.1@4500,2350.32 ; IC1_2.5@4415.87,3177.09 v1(4460.87,3177.09) C71_2.1@4500,3177.09
  Top Layer w15: v1(1505,755) C89.2@1505,720 U9.8@1570,720 ; v1(4015,950) R3.2@4015,980 ; v1(4080,950) R2.2@4080,980 ; R4.2@4080,1375 v1(4080,1405) ; R5.2@4145,1376.24 v1(4145,1406.24) ; C18.2@4338.74,1321.24 C17.2@4405,1321.24 v1(4372.5,1321.24)
  Top Layer w20: C80.2@1380.54,1098.79 C81.2@1380.54,1035.6 v1(1410.54,1035.6) ; v1(1482.09,1391) C79.2@1482.09,1421 C78.2@1545.28,1421 ; C74.2@1761.81,875 C75.2@1825,875 v1(1825,905) ; v1(1896.54,1319.46) C77.2@1926.54,1319.46 C76.2@1926.54,1256.27
  other v1: 1400,3460 1440,3460 1400,3500 1440,3500 1400,3535 1440,3535
+5V: C15.2 C16.2 C59.1 C90.1 C91.1 L4.2 L6.2 U1.28 U1.29
  other v1: 4422.5,1158.74 4487.5,1158.74 4552.5,1158.74 4422.5,1193.74 4487.5,1193.74 4552.5,1193.74 4425,1535 4490,1535 4555,1535 4425,1570 4490,1570 4555,1570
+5VLOC_1: C68_1.1 C88_1.2 IC2_1.1 IC2_1.4 IC2_1.6 IC2_1.7 IC2_1.8 L8_1.2 L9_1.2 R47_1.2 R48_1.2 R49_1.2 U7_1.5 | length 1599.1
  Top Layer w6: v1(3957.5,2210.72) R49_1.2@3995.47,2210.72 ; v1(3963.98,2328.39) IC2_1.4@3963.98,2389.7 ; IC2_1.6@4015.16,2358.2 4015.16,2333.07 4020,2328.23 4030,2328.23 4034.84,2333.07 ; IC2_1.7@4034.84,2358.2 4034.84,2333.07 ; IC2_1.8@4054.53,2358.2 4054.53,2333.07 4049.69,2328.23 4039.69,2328.23 4034.84,2333.07 ; 4055,2333.23 4059.84,2328.39 v1(4089.84,2328.39) ; R48_1.2@4122.5,2630.7 v1(4160.48,2630.7) ; R47_1.2@4233.5,2389.7 v1(4271.48,2389.7)
  Top Layer w10: C88_1.2@3895,2453.23 v1(3895,2488.23)
  Bottom Layer w10: v1(3895,2488.23) 3895,2621.92 3903.79,2630.7 4257.52,2630.7 4271.48,2616.75 4271.48,2339.71 4260.16,2328.39 v1(3963.98,2328.39) 3963.98,2262.2 3957.5,2255.72 v1(3957.5,2210.72)
+5VLOC_2: C68_2.1 C88_2.2 IC2_2.1 IC2_2.4 IC2_2.6 IC2_2.7 IC2_2.8 L8_2.2 L9_2.2 R47_2.2 R48_2.2 R49_2.2 U7_2.5 | length 1599.1
  Top Layer w6: v1(3957.5,3037.5) R49_2.2@3995.47,3037.5 ; v1(3963.98,3155.16) IC2_2.4@3963.98,3216.47 ; IC2_2.6@4015.16,3184.98 4015.16,3159.84 4020,3155 4030,3155 4034.84,3159.84 ; IC2_2.7@4034.84,3184.98 4034.84,3159.84 ; IC2_2.8@4054.53,3184.98 4054.53,3159.84 4049.69,3155 4039.69,3155 4034.84,3159.84 ; 4055,3160 4059.84,3155.16 v1(4089.84,3155.16) ; R48_2.2@4122.5,3457.48 v1(4160.48,3457.48) ; R47_2.2@4233.5,3216.47 v1(4271.48,3216.47)
  Top Layer w10: C88_2.2@3895,3280 v1(3895,3315)
  Bottom Layer w10: v1(3895,3315) 3895,3448.69 3903.79,3457.48 4257.52,3457.48 4271.48,3443.52 4271.48,3166.48 4260.16,3155.16 v1(3963.98,3155.16) 3963.98,3088.98 3957.5,3082.5 v1(3957.5,3037.5)
A0: R60.2 U9.1 | length 106.2
  Top Layer w6: R60.2@1555,390 1555,425 1570,440 U9.1@1570,490
A1: R61.2 U9.2 | length 100
  Top Layer w6: R61.2@1620,390 U9.2@1620,490
A2: R62.2 U9.3 | length 106.2
  Top Layer w6: U9.3@1670,490 1670,440 1685,425 R62.2@1685,390
ALI: R54.1 U8.12 | length 183.7
  Top Layer w6: R54.1@1379.94,955 1434.73,955 1440,960.27 1440,1034.46 1445.27,1039.73 U8.12@1485.08,1039.73
AVDD: C43.2 U3.2 | length 274.3
  Top Layer w15: U3.2@941.93,2263.2 941.93,2341.93 960,2360 C43.2@1130,2360
BATP: R12.2 U2.18 | length 327.7
  Top Layer w6: R12.2@3515,910 3515,847.5 3628.57,733.93 3628.57,683.7 3633.85,678.43 U2.18@3680.75,678.43
BP_GND: BH3.1 BH3.3 C39.1 C40.2 C41.1 C42.1 C43.1 C44.1 C45.1 R18.1 R20.1 R26.1 R57.1 RT2.1 U3.9 U3.16 U3.20 U3.23 U3.24 | length 2736
  Top Layer w6: R26.1@450,2840 450,2727.27 455.27,2722 693,2722 730,2685 730,2610.82 751.91,2588.91 R57.1@751.91,2565 ; C45.1@641.91,2450 v1(641.91,2481.91) ; v1(765.49,1815.18) R18.1@765.49,1850.18 ; C44.1@806.91,2450 v1(806.91,2481.91) ; R20.1@1180,2805 v1(1215,2805)
  Top Layer w15: U3.16@762.8,2036.8 v1(762.8,2097.2) ; v1(762.8,2202.8) U3.9@762.8,2263.2 ; C40.2@821.4,2665 v1(821.4,2697.5) ; U3.20@865.16,2036.8 v1(865.16,2097.2) ; C39.1@886.4,2665 v1(886.4,2697.5) ; U3.23@941.93,2036.8 v1(941.93,2097.2) ; v1(967.52,1976.39) U3.24@967.52,2036.8
  Top Layer w20: v1(1030,2175.7) C41.1@1030,2208.2 ; v1(1100,2083.2) C42.1@1100,2115.7 ; C43.1@1100,2507.5 v1(1100,2540) ; v1(1160,2083.2) C42.1@1160,2115.7 ; C43.1@1160,2507.5 v1(1160,2540)
  Bottom Layer w6: BH3.3@1206.69,3354.33 1206.69,3033.31 1215,3025 v1(1215,2805)
  Bottom Layer w20: RT2.1@285,3465 358.43,3465 446.85,3376.57 BH3.1@446.85,3354.33
  Bottom Layer w100: BH3.1@446.85,3354.33 BH3.3@1206.69,3354.33
  other v1: 391.85,2955 446.85,2955 501.85,2955 391.85,2990 446.85,2990 501.85,2990 391.85,3025 446.85,3025 501.85,3025
BTST1: C27.2 U2.4 | length 105.5
  Top Layer w6: U2.4@3829.37,631.18 3861.18,631.18 3885,655 C27.2@3925,655
BTST2: C32.1 U2.19 | length 95.2
  Top Layer w6: C32.1@3589.13,670 3614,670 3621.32,662.68 U2.19@3681.34,662.68
C\E\: U2.13 U8.26 | length 2540.6
  Top Layer w6: U8.26@1822.01,1059.42 1879.42,1059.42 1885,1065 v1(2195,1065) ; U2.13@3746.69,721.73 3746.69,741.31 3731.25,756.75 3731.25,796.25 v1(3780,845)
  Bottom Layer w6: v1(2195,1065) 2255,1065 2410,1220 2425,1220 3765,1220 3780,1205 v1(3780,845)
CHRG_BAT: C87.2 C92.2 T2.3 U2.22 U2.23
EN_1: IC2_1.5 R49_1.1 U8.45 | length 3459.5
  Top Layer w6: v1(1600,2110) 1600,1545 1595,1540 1595,1385 1604.33,1375.67 U8.45@1604.33,1316.46 ; IC2_1.5@3995.47,2358.2 R49_1.1@3995.47,2265.72 v1(4033.45,2265.72)
  Bottom Layer w6: v1(1600,2110) 1775.36,2110 3931.77,2110 4033.45,2211.68 v1(4033.45,2265.72)
EN_2: IC2_2.5 R49_2.1 U8.46 | length 3997.9
  Top Layer w6: v1(1575,2405) 1575,1375 1584.65,1365.35 U8.46@1584.65,1316.46 ; IC2_2.5@3995.47,3184.98 R49_2.1@3995.47,3092.5 v1(4033.45,3092.5)
  Bottom Layer w6: v1(1575,2405) 2500,2405 3030,2935 3930,2935 4033.45,3038.45 v1(4033.45,3092.5)
F\A\U\L\T\_1: IC2_1.13 R48_1.1 U8.41 | length 3895.9
  Top Layer w6: U8.41@1683.07,1316.46 1683.07,1371.59 1720.94,1409.46 v1(1720.94,2135) ; IC2_1.13@4054.53,2480.25 4054.53,2522.57 4060.16,2528.2 4115.16,2528.2 4122.5,2535.55 R48_1.1@4122.5,2575.7 v1(4160.48,2575.7)
  Bottom Layer w6: v1@1720,2135 1770,2135 1785.71,2135 3924.73,2135 3930,2140.27 3930,2558.23 3947.48,2575.7 v1(4160.48,2575.7)
F\A\U\L\T\_2: IC2_2.13 R48_2.1 U8.38 | length 4346.3
  Top Layer w6: U8.38@1742.13,1316.46 1742.13,1347.13 1795,1400 v1(1795,2430) ; IC2_2.13@4054.53,3307.02 4054.53,3349.35 4060.16,3354.98 4115.16,3354.98 4122.5,3362.32 R48_2.1@4122.5,3402.48 v1(4160.48,3402.48)
  Bottom Layer w6: v1(1795,2430) 2490,2430 3015,2955 3924.73,2955 3930,2960.27 3930,3385 3947.48,3402.48 v1(4160.48,3402.48)
GATE_VBUS: T1.4 U1.21 | length 622.3
  Top Layer w6: U1.21@4267.87,1075 4267.87,985.87 v1(4290,963.74) ; v1(4725,949.37) T1.4@4725.04,914.37 T1.4@4725.04,914.37
  Bottom Layer w6: v1(4290,963.74) 4333.74,963.74 4365,995 4415,995 4460.63,949.37 v1(4725,949.37)
GATE_VSYS: T1.2 U1.20 | length 726
  Top Layer w6: v1(4252.13,963.74) U1.20@4252.13,1075 ; T1.2@4725.04,814.37 v1(4765,814.37)
  Bottom Layer w6: v1(4252.13,963.74) 4280.87,935 4325,935 4395,865 4714.37,865 v1(4765,814.37)